# Altium PCB A5000_8MB.pcbdoc (part 1 of 2)
Units mm, origin at the board's own origin, x right, y up, seen from the top; angles counter-clockwise.
Board outline 99.95 x 80.31 mm, 4 copper layers (TopLayer, GND, VCC, BottomLayer), stack 1.659 mm thick; 71 components, 180 nets, 691 pads, 418 vias.
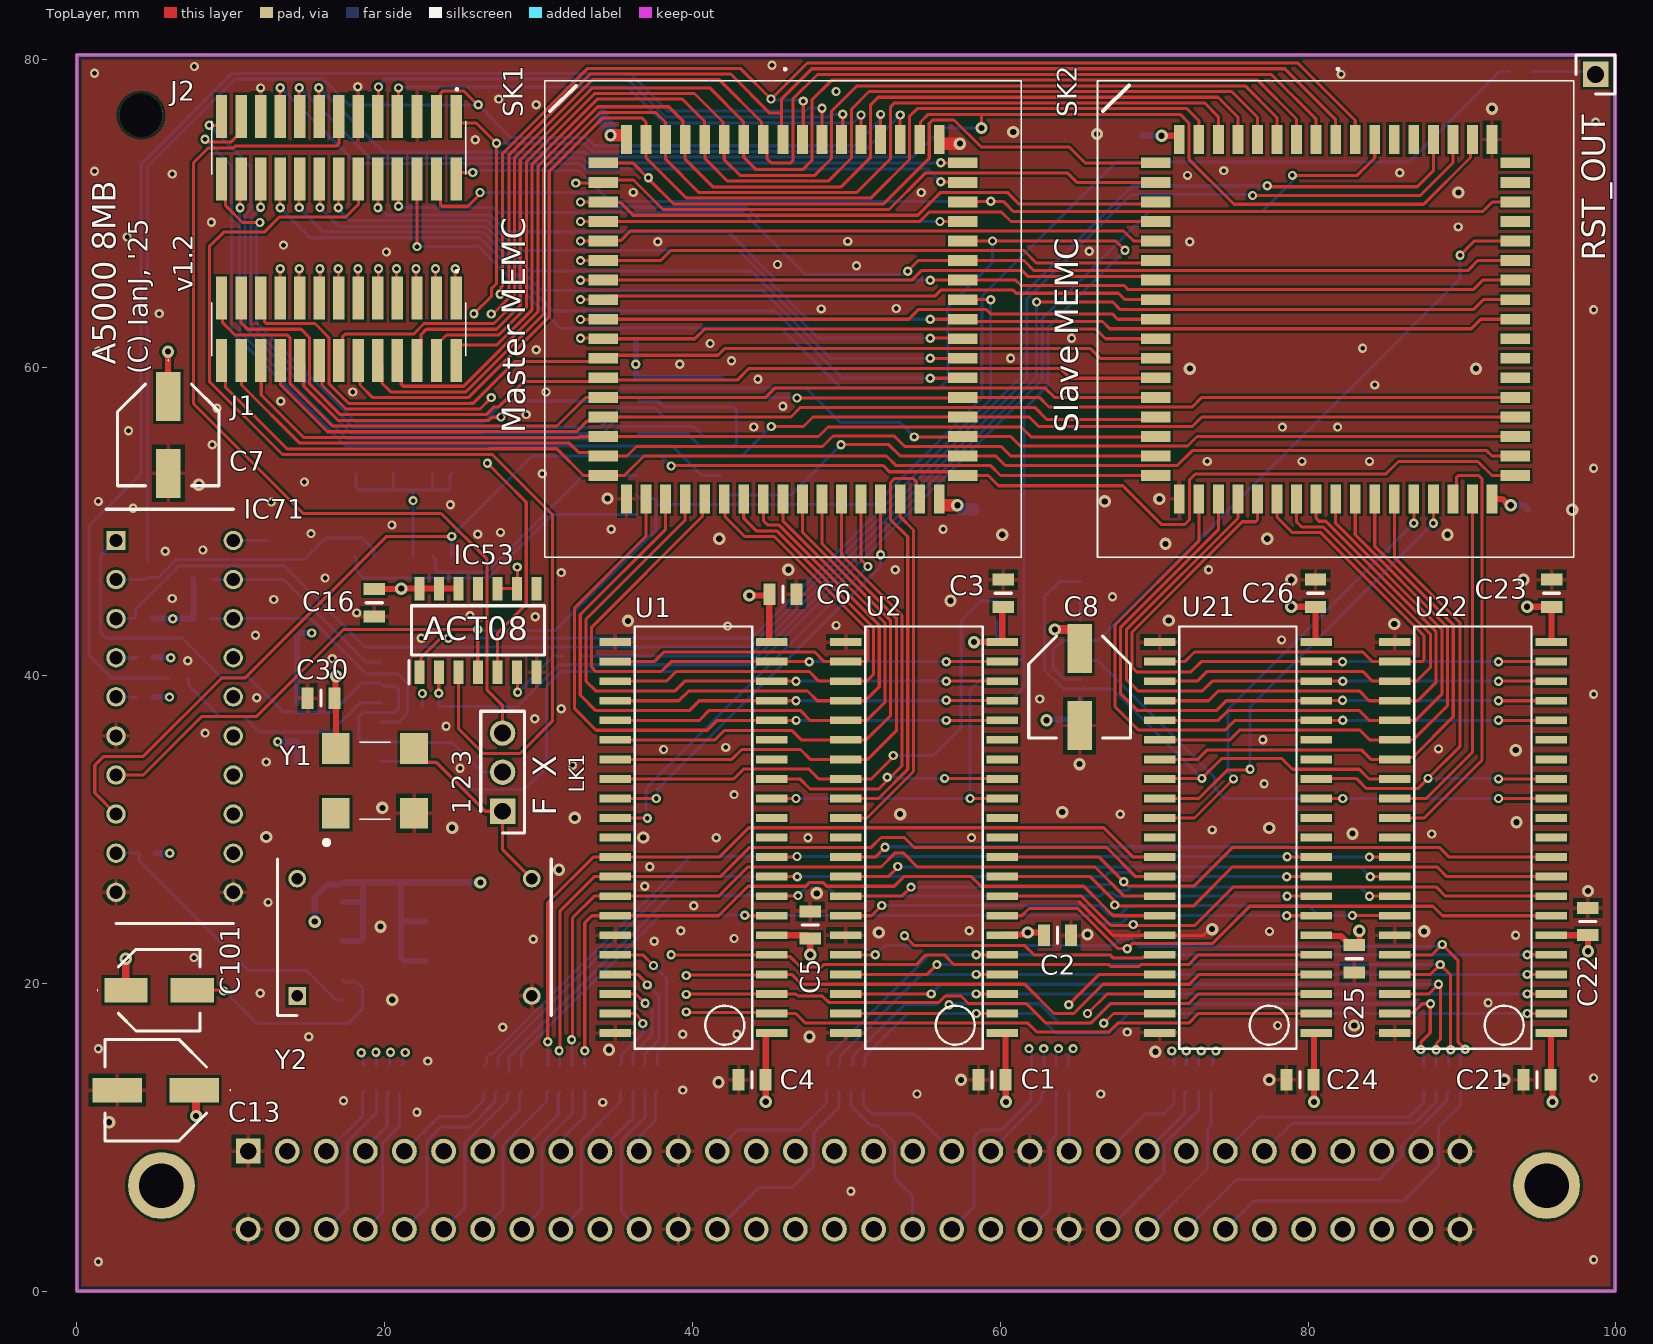
[diagram p0: TopLayer view]
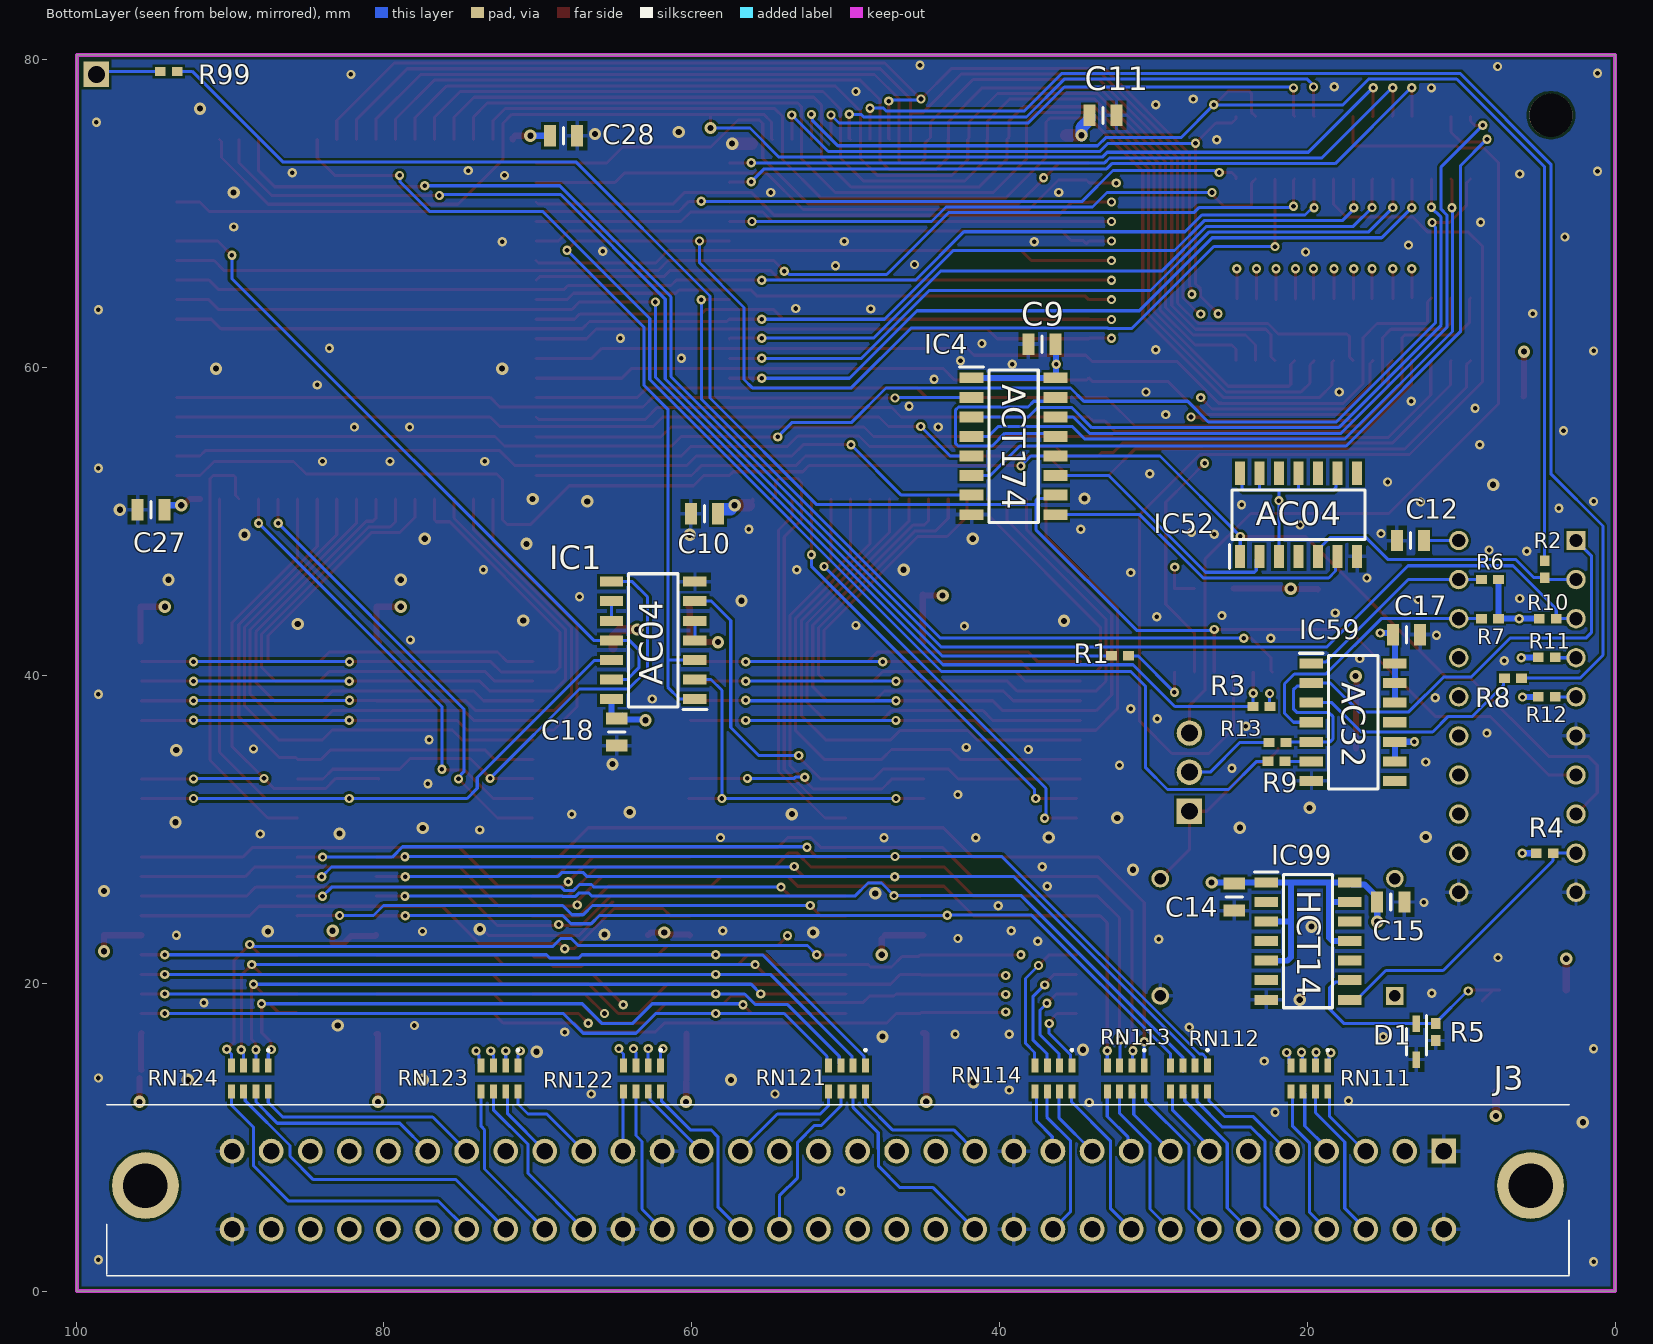
[diagram p1: BottomLayer view, seen from below]
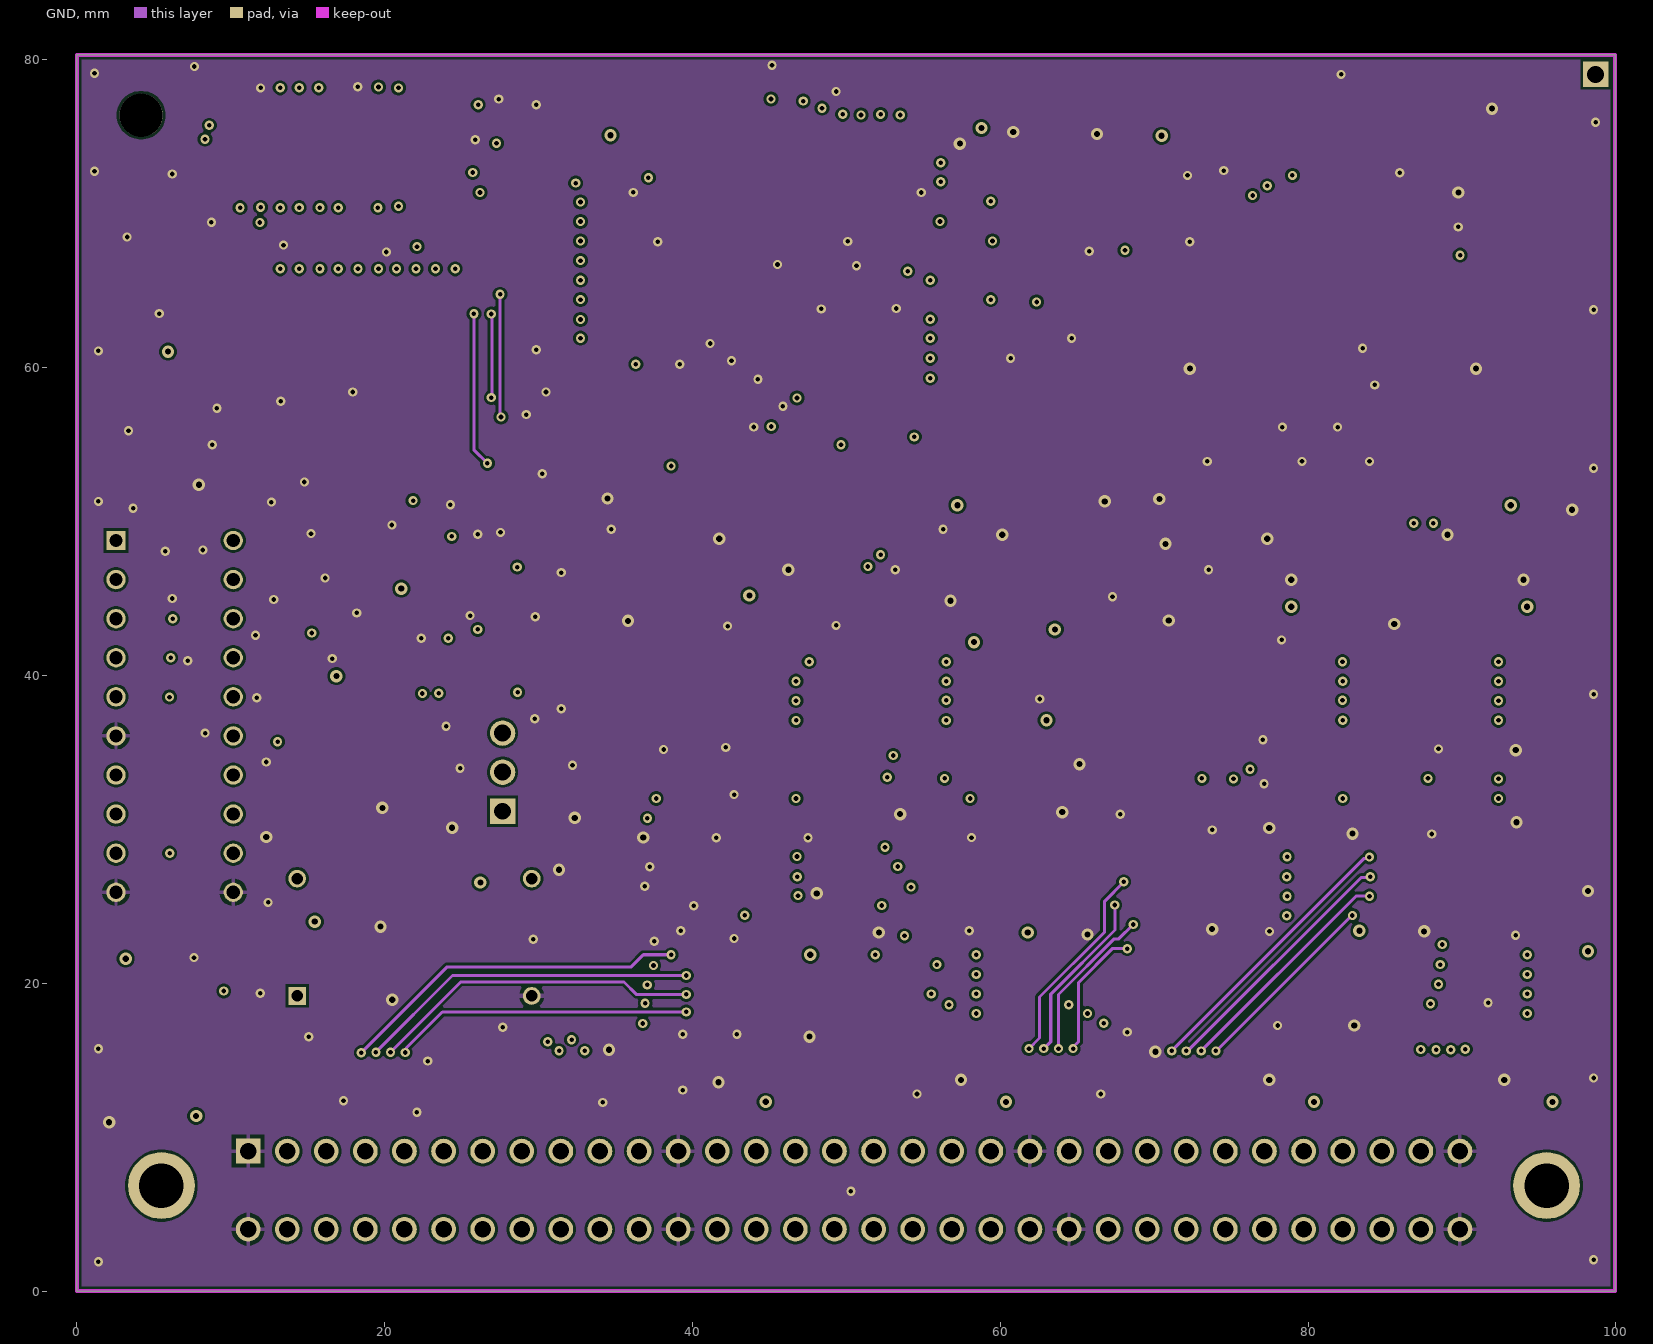
[diagram p2: GND]
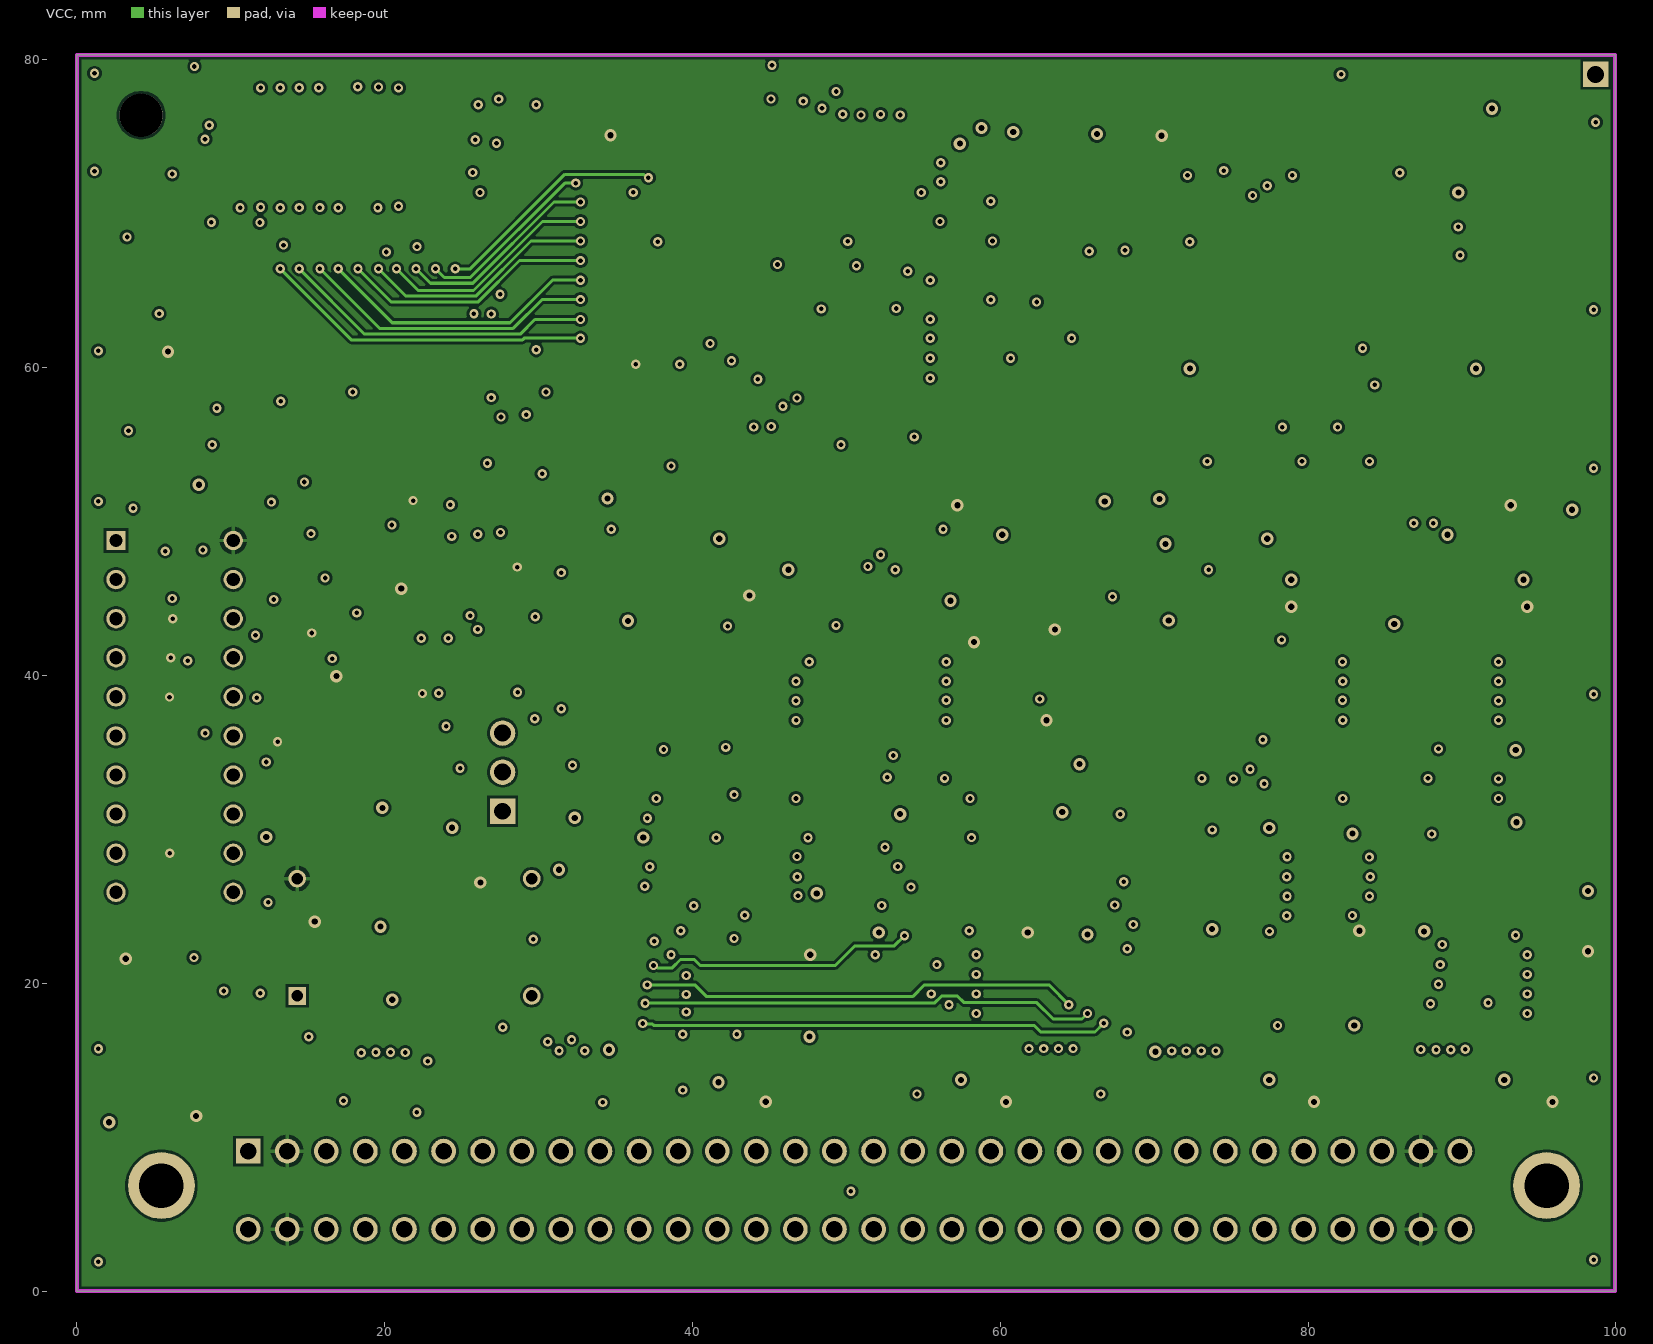
[diagram p3: VCC]
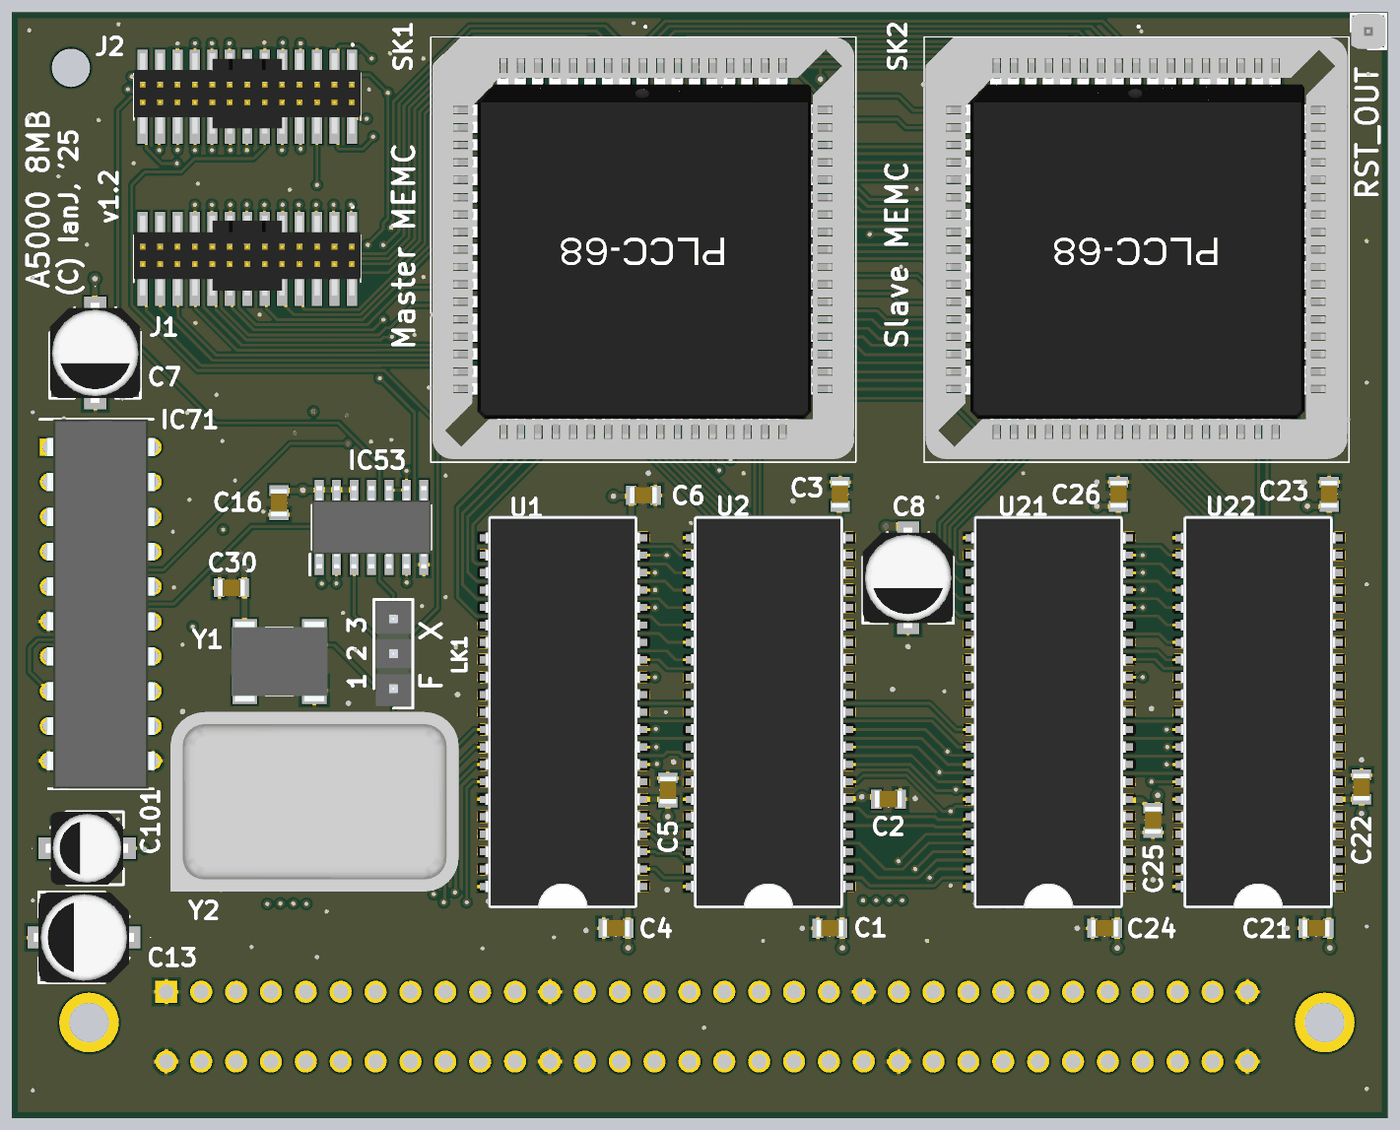
[diagram p5: 3D render of the assembled board from above, using the file's embedded part models]
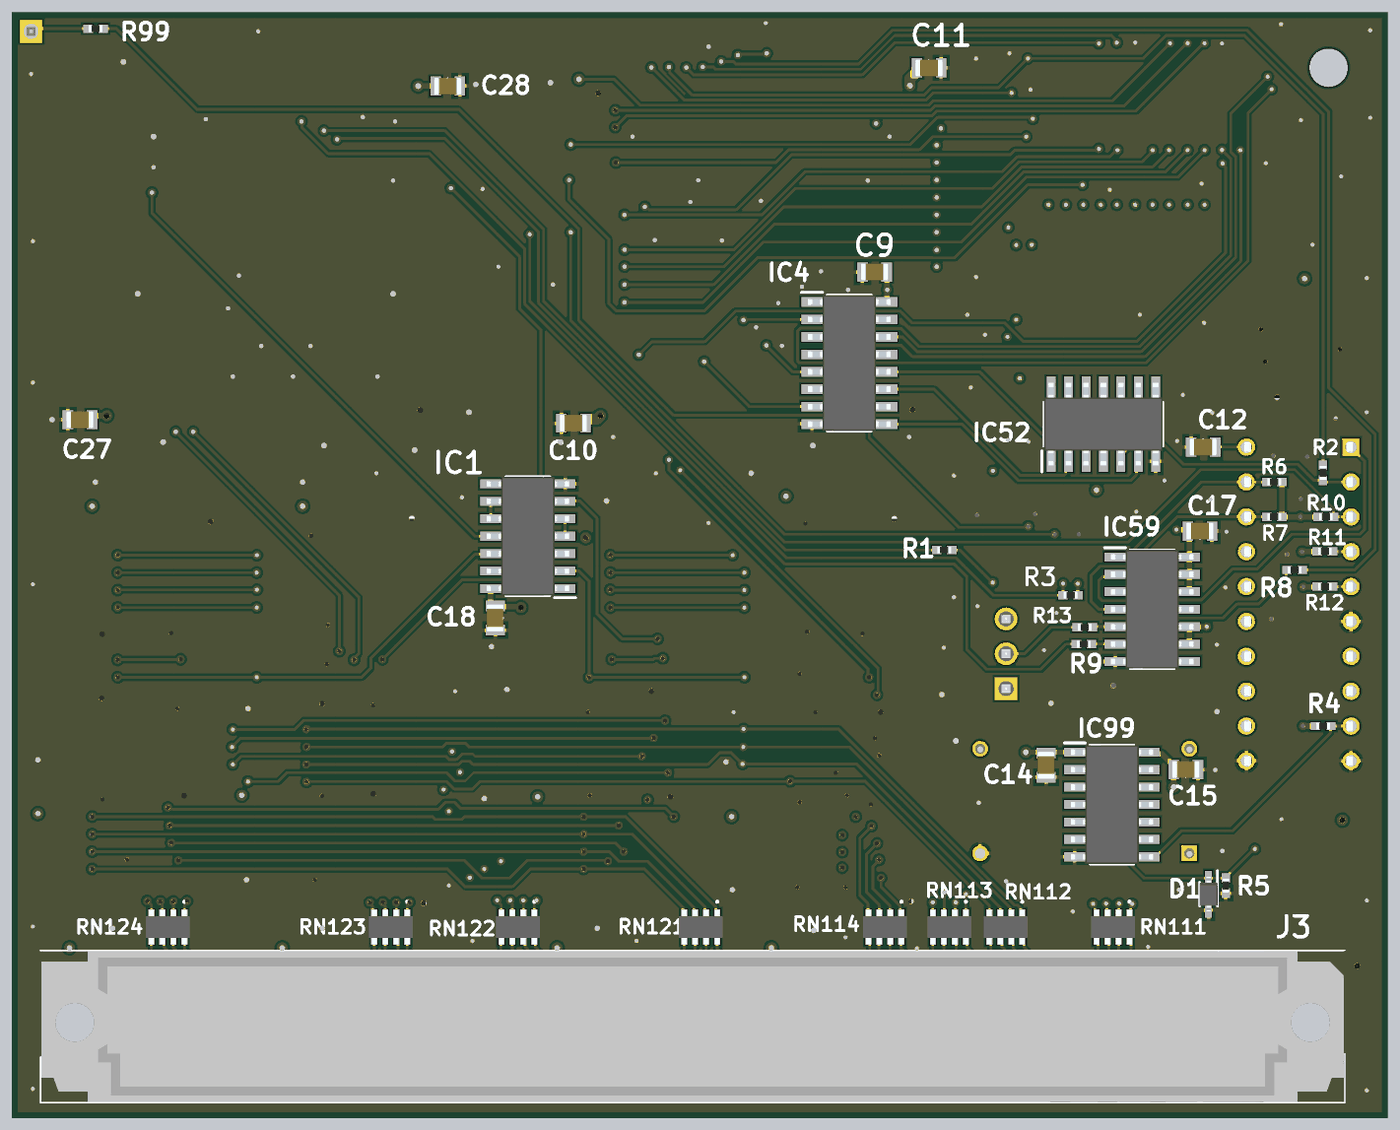
[diagram p6: 3D render of the assembled board from below, using the file's embedded part models]

## Layer stack, top to bottom
TopSolder: solder mask 0.01, Solder Resist, Dk 3.5
TopLayer: signal copper 0.036
Dielectric 1: prepreg 0.2083, PP-022, Dk 4.5
GND: signal copper 0.035
Dielectric 2: core 1.1, Core-043, Dk 4.3
VCC: signal copper 0.035
Dielectric 3: prepreg 0.2083, PP-022, Dk 4.5
BottomLayer: signal copper 0.036
BottomSolder: solder mask 0.01, Solder Resist, Dk 3.5

## Board outline
0,0 0,80.315 99.949,80.315 99.949,0

## Design rules (kind name [scope] priority, off if disabled: settings)
BoardOutlineClearance [All] p1: gap=0.3 ignorepadtopadclearanceinfootprint=FALSE
Clearance [All] p1: gap=0.17 ignorepadtopadclearanceinfootprint=FALSE except(0.163: Arc-SMDPad Track-SMDPad; 0.3: Via-Via; 0.5: Via-Hole)
ComponentClearance ComponentClearance_Z2_Z3 [(InComponent('Z2') OR InComponent('Z3')) vs InComponent('No Component')] p1: gap=0 collisioncheckmode=3 verticalgap=0 showdistances=FALSE
ComponentClearance ComponentClearance_U4_J104 [All] p2: gap=0 collisioncheckmode=3 verticalgap=0 showdistances=FALSE
ComponentClearance ComponentClearance_J3_J4 [InComponent('J3') vs InComponent('J4')] p3: gap=0 collisioncheckmode=3 verticalgap=0 showdistances=FALSE
ComponentClearance ComponentClearance_J103_J104 [InComponent('J103') vs InComponent('J104')] p4: gap=0 collisioncheckmode=3 verticalgap=0 showdistances=FALSE
ComponentClearance [All] p5: gap=0.254 collisioncheckmode=3 verticalgap=0.254 showdistances=FALSE
DiffPairsRouting [InDifferentialPairClass('All Differential Pairs')] p1: maxlimit=0.254 minlimit=0.114 mostfreqgap=0.17 toplayer_mingap=0.17 toplayer_minwidth=0.2 toplayer_maxwidth=0.381 toplayer_prefwidth=0.237 midlayer1_prefgap=0.115 midlayer1_minwidth=0.381 midlayer1_maxwidth=0.381 midlayer1_prefwidth=0.381 midlayer2_prefgap=0.115 midlayer2_minwidth=0.381 midlayer2_maxwidth=0.381 midlayer2_prefwidth=0.381 bottomlayer_mingap=0.17 bottomlayer_minwidth=0.2 bottomlayer_maxwidth=0.381 bottomlayer_prefwidth=0.237 maxuncoupledlength=12.7
FabricationTestPointUsage TestPointUsage [All] p1: valid=0 allowmultiple=FALSE
FabricationTestpoint Testpoint [All] p1: side=3 testpointundercomponent=TRUE minsize=1.016 maxsize=2.54 preferedsize=1.524 minholesize=0.508 maxholesize=1.016 preferedholesize=0.813 testpointgrid=0.025 allowsidetop=TRUE allowsidebottom=TRUE usegrid=TRUE gridtolerance=0
HoleSize [All] p1: absolutevalues=TRUE maxlimit=5 minlimit=0.3 maxpercent=80.000 minpercent=20.000
HoleToHoleClearance [All] p1: gap=0.25 allowstackedmicrovias=FALSE
MinimumSolderMaskSliver [All] p1: minsoldermaskwidth=0.02
PlaneClearance [All] p1: clearance=0.2
PlaneConnect [All] p1: pad.planeconnectstyle=Relief pad.reliefexpansion=0.508 pad.reliefentries=4 pad.reliefconductorwidth=0.254 pad.reliefairgap=0.254 via.planeconnectstyle=Direct via.reliefexpansion=0.508 via.reliefentries=4 via.reliefconductorwidth=0.254 via.reliefairgap=0.254
PolygonConnect [All] p1: thpad.connectstyle=Relief thpad.reliefconductorwidth=0.254 thpad.reliefentries=4 thpad.polygonreliefangle="90 Angle" thpad.airgapwidth=0.254 smdpad.connectstyle=Relief smdpad.reliefconductorwidth=0.254 smdpad.reliefentries=4 smdpad.polygonreliefangle="90 Angle" smdpad.airgapwidth=0.254 via.connectstyle=Direct via.reliefconductorwidth=0.254 via.reliefentries=4 via.polygonreliefangle="90 Angle" via.airgapwidth=0.254
RoutingVias [All] p1: holewidth=0.4 width=0.8 viastyle="Through Hole" minholewidth=0.3 minwidth=0.6 maxholewidth=0.4 maxwidth=0.8
SilkToSilkClearance [All] p1: silktosilkclearance=0.1
SilkToSolderMaskClearance SilkscreenOverComponentPads [IsPad] p1: minsilkscreentomaskgap=0.1 clearancetoexposedcopper=TRUE
SolderMaskExpansion [All] p1: expansion=0.075 istentingtop=FALSE
SupplyNets "Schematic Supply Nets_1" [InNet('GND')] p1: voltage=0.000
SupplyNets "Schematic Supply Nets" [InNet('VCC')] p2: voltage=0.000
Width [All] p1: maxlimit=5 minlimit=0.15 preferedwidth=0.2
19 further rules are at their usual default settings.

## Classes and differential pairs
component class A5000_8MB_RAMs: C1 C2 C3 C4 C5 C6 C7 C8 C21 C22 C23 C24 C25 C26 RN111 RN112 RN113 RN114 RN121 RN122 RN123 RN124 U1 U2 U21 U22
component class A5000_8MB_Glue: C30 C101 D1 IC1 IC4 IC52 IC53 IC59 IC71 IC99 LK1 R1 R2 R3 R4 R5 R6 R7 R8 R9 R10 R11 R12 R13 R99 RST_OUT Y1 Y2
component class A5000_8MB_MEMCs: C9 C10 C11 C12 C13 C14 C15 C16 C17 C18 C27 C28 J1 J2 J3 SK1 SK2

## Components (designator, comment, footprint, x,y, rotation, side; value= is the part's Value field where it differs from the comment)
C1 "100nF" 0805cap 59.462,13.721 r180 top
C2 "100nF" 0805cap 63.715,23.123 r0 top
C3 "100nF" 0805cap 60.192,45.339 r90 top
C4 "100nF" 0805cap 43.876,13.721 r180 top
C5 "100nF" 0805cap 47.655,23.783 r90 top
C6 "100nF" 0805cap 45.872,45.268 r0 top
C7 "47uF" EEE1AA101SP 5.943,55.626 r270 top
C8 "47uF" EEE1AA101SP 65.151,39.243 r270 top
C9 "100nF" 0805cap 37.247,61.524 r0 bottom
C10 "100nF" 0805cap 59.176,50.509 r0 bottom
C11 "100nF" 0805cap 33.277,76.39 r180 bottom
C12 "100nF" 0805cap 13.306,48.768 r0 bottom
C13 "47uF" EEE1AA101SP 5.123,13.053 r180 top
C14 "100nF" 0805cap 24.754,25.599 r270 bottom
C15 "100nF" 0805cap 14.576,25.278 r180 bottom
C16 "100nF" 0805cap 19.326,44.72 r270 top
C17 "100nF" 0805cap 13.543,42.649 r180 bottom
C18 "100nF" 0805cap 64.875,36.322 r270 bottom
C21 "100nF" 0805cap 94.869,13.721 r180 top
C22 "100nF" 0805cap 98.171,24.003 r90 top
C23 "100nF" 0805cap 95.821,45.339 r90 top
C24 "100nF" 0805cap 79.468,13.721 r180 top
C25 "100nF" 0805cap 82.995,21.59 r270 top
C26 "100nF" 0805cap 80.479,45.339 r90 top
C27 "100nF" 0805cap 95.126,50.764 r0 bottom
C28 "100nF" 0805cap 68.326,75.063 r180 bottom
C30 "100nF" 0805cap 15.868,38.528 r180 top
C101 "10uF" EEE0GA101SR 5.345,19.55 r0 top
D1 "1N4148WS-7-F" SOD2513X120N 12.915,16.203 r270 bottom
IC1 "SN74AC04D" SOIC127P600X175-14N 62.5,42.28 r0 bottom
IC4 "CD74ACT174M96" SOIC127P600X175-16N 39.084,54.889 r180 bottom
IC52 "SN74AC04D" SOIC127P600X175-14N 20.574,50.439 r90 bottom
IC53 "CD74ACT08M" SOIC127P600X175-14N 26.069,42.926 r90 top
IC59 "CD74AC32M" SOIC127P600X175-14N 17.018,36.957 r180 bottom
IC71 "ATF16V8C" DIP762W66P254L2692H508Q20N 6.35,37.338 r0 top locked
IC99 "SN74HCT14DR" SOIC127P600X175-14N 19.951,22.733 r180 bottom
J1 "FTSH-113-01-L-DV-K" FTSH-113-XX-YYY-DV-K 17.018,62.484 r180 top locked
J2 "FTSH-113-01-L-DV-K" FTSH-113-XX-YYY-DV-K 17.018,74.292 r180 top locked
J3 "5650934-5" 56509345 11.125,9.093 r180 bottom locked
LK1 "PREC003SAAN-RC" HDRV3W64P0X254_1X3_762X254X868P 27.664,31.173 r90 top
R1 "33R" RESC1005X40N 32.172,41.275 r180 bottom
R2 "68R" RESC1005X40N 4.578,46.9 r90 bottom
R3 "10K" RESC1005X40N 22.971,37.978 r180 bottom
R4 "10K" RESC1005X40N 4.572,28.448 r0 bottom
R5 "47K" RESC1005X40N 11.656,16.828 r270 bottom
R6 "1K" RESC1005X40N 8.128,46.228 r180 bottom
R7 "1K" RESC1005X40N 8.128,43.688 r180 bottom
R8 "68R" RESC1005X40N 6.64,39.822 r0 bottom
R9 "68R" RESC1005X40N 21.999,34.417 r180 bottom
R10 "10K" RESC1005X40N 4.372,43.688 r0 bottom
R11 "10K" RESC1005X40N 4.445,41.179 r0 bottom
R12 "10K" RESC1005X40N 4.445,38.608 r0 bottom
R13 "33R" RESC1005X40N 21.934,35.647 r0 bottom
R99 "68R" RESC1005X40N 93.98,79.248 r180 bottom
RN111 "YC164-JR-0768RL" YC164JR0768RL 19.87,13.804 r0 bottom
RN112 "YC164-JR-0768RL" YC164JR0768RL 27.686,13.804 r0 bottom
RN113 "YC164-JR-0768RL" YC164JR0768RL 31.795,13.804 r0 bottom
RN114 "YC164-JR-0768RL" YC164JR0768RL 36.494,13.804 r0 bottom
RN121 "YC164-JR-0768RL" YC164JR0768RL 49.911,13.804 r0 bottom
RN122 "YC164-JR-0768RL" YC164JR0768RL 63.225,13.804 r0 bottom
RN123 "YC164-JR-0768RL" YC164JR0768RL 72.485,13.804 r0 bottom
RN124 "YC164-JR-0768RL" YC164JR0768RL 88.715,13.804 r0 bottom
RST_OUT "90120-0761" HDRV1W90P0X254_1X1_232X249X560P 98.679,79.05 r90 top
SK1 "Master MEMC socket" MEMC_Socket 45.872,63.144 r0 top locked
SK2 "Slave MEMC socket" MEMC_Socket 81.792,63.144 r0 top locked
U1 "IS41C16105C" SOJ-42 40.066,29.464 r90 top locked
U2 "IS41C16105C" SOJ-42 55.042,29.464 r90 top locked
U21 "IS41C16105C" SOJ-42 75.442,29.464 r90 top locked
U22 "IS41C16105C" SOJ-42 90.711,29.464 r90 top locked
Y1 "CB3-3C-50M0000" CB33C50M0000 19.368,33.147 r0 top
Y2 "50MHz OSC" DIPS762W56P1524L1778H241Q4N 14.314,19.174 r90 top locked

## Footprints (in the part's own frame and the unit in brackets; to place one, negate y for a bottom-side part, rotate by r counter-clockwise, add the part's x,y. Pads: shape width x height; smd on the part's side, far side on the other; paste and mask are expansions set on the pad)
0805cap [mm]
  rect 0.78x1.39 smd: 1(-0.88,0) 2(0.88,0)
  silkscreen extent 0,-0.53 0,0.53, body extent -1,-0.63 1,0.63, height 0.6
56509345 [mm]
  rect 1.605x1.605 hole 1.07: A1(0,0)
  round 1.605 hole 1.07: A2(-2.54,0) A3(-5.08,0) A4(-7.62,0) A5(-10.16,0) A6(-12.7,0) A7(-15.24,0) A8(-17.78,0) A9(-20.32,0) A10(-22.86,0) A11(-25.4,0) A12(-27.94,0) A13(-30.48,0) A14(-33.02,0) A15(-35.56,0) A16(-38.1,0) A17(-40.64,0) A18(-43.18,0) A19(-45.72,0) A20(-48.26,0) A21(-50.8,0) A22(-53.34,0) A23(-55.88,0) A24(-58.42,0) A25(-60.96,0) A26(-63.5,0) A27(-66.04,0) A28(-68.58,0) A29(-71.12,0) A30(-73.66,0) A31(-76.2,0) A32(-78.74,0) C1(0,-5.08) C2(-2.54,-5.08) C3(-5.08,-5.08) C4(-7.62,-5.08) C5(-10.16,-5.08) C6(-12.7,-5.08) C7(-15.24,-5.08) C8(-17.78,-5.08) C9(-20.32,-5.08) C10(-22.86,-5.08) C11(-25.4,-5.08) C12(-27.94,-5.08) C13(-30.48,-5.08) C14(-33.02,-5.08) C15(-35.56,-5.08) C16(-38.1,-5.08) C17(-40.64,-5.08) C18(-43.18,-5.08) C19(-45.72,-5.08) C20(-48.26,-5.08) C21(-50.8,-5.08) C22(-53.34,-5.08) C23(-55.88,-5.08) C24(-58.42,-5.08) C25(-60.96,-5.08) C26(-63.5,-5.08) C27(-66.04,-5.08) C28(-68.58,-5.08) C29(-71.12,-5.08) C30(-73.66,-5.08) C31(-76.2,-5.08) C32(-78.74,-5.08)
  round 4.335 hole 2.89: MH1(5.63,-2.24) MH2(-84.37,-2.24)
  silkscreen extent -86.87,-8.09 8.13,3.01, body extent -86.8,-8.05 8.06,2.97, height 11.63
CB33C50M0000 [mm]
  rect 1.8x2 smd: 1(-2.54,-2.1) 2(2.54,-2.1) 3(2.54,2.1) 4(-2.54,2.1)
  silkscreen extent -3.3,-4.15 1,2.5, body extent -3.5,-2.92 3.5,2.92, height 1.9
DIP762W66P254L2692H508Q20N [mm]
  rect 1.26x1.26 hole 0.86: 1(-3.81,11.43)
  round 1.26 hole 0.86: 2(-3.81,8.89) 3(-3.81,6.35) 4(-3.81,3.81) 5(-3.81,1.27) 6(-3.81,-1.27) 7(-3.81,-3.81) 8(-3.81,-6.35) 9(-3.81,-8.89) 10(-3.81,-11.43) 11(3.81,-11.43) 12(3.81,-8.89) 13(3.81,-6.35) 14(3.81,-3.81) 15(3.81,-1.27) 16(3.81,1.27) 17(3.81,3.81) 18(3.81,6.35) 19(3.81,8.89) 20(3.81,11.43)
  silkscreen extent -4.44,-13.46 3.81,13.46, body extent -3.98,-13.46 3.98,13.46, height 5.08
DIPS762W56P1524L1778H241Q4N [mm]
  rect 1.15x1.15 hole 0.75: 1(0,0)
  round 1.15 hole 0.75: 2(0,-15.24) 3(7.62,-15.24) 4(7.62,0)
  silkscreen extent -1.27,-16.51 8.89,1.27, body extent -2.78,-18.11 10.3,2.89, height 6
EEE0GA101SR [mm]
  rect 2.8x1.6 smd: 1(-2.15,0) 2(2.15,0)
  silkscreen extent -4.03,-2.65 2.65,2.65, body extent -3,-2.65 3,2.65, height 5.8
EEE1AA101SP [mm]
  rect 3.2x1.6 smd: 1(-2.5,0) 2(2.5,0)
  silkscreen extent -4.88,-3.3 3.3,3.3, body extent 0,0 0,0
FTSH-113-XX-YYY-DV-K [mm]
  rect 0.74x2.79 smd: 1(-7.62,-2.035) 2(-7.62,2.035) 3(-6.35,-2.035) 4(-6.35,2.035) 5(-5.08,-2.035) 6(-5.08,2.035) 7(-3.81,-2.035) 8(-3.81,2.035) 9(-2.54,-2.035) 10(-2.54,2.035) 11(-1.27,-2.035) 12(-1.27,2.035) 13(0,-2.035) 14(0,2.035) 15(1.27,-2.035) 16(1.27,2.035) 17(2.54,-2.035) 18(2.54,2.035) 19(3.81,-2.035) 20(3.81,2.035) 21(5.08,-2.035) 22(5.08,2.035) 23(6.35,-2.035) 24(6.35,2.035) 25(7.62,-2.035) 26(7.62,2.035)
  silkscreen extent -8.25,-3.83 8.25,1.72, body extent -8.26,-3.15 8.25,2.69, height 6.12
HDRV1W90P0X254_1X1_232X249X560P [mm]
  rect 1.65x1.65 hole 1.1: 1(0,0)
  silkscreen extent -1.27,-1.27 1.27,1.27, body extent -1.27,-1.25 1.27,1.25, height 5.37
HDRV3W64P0X254_1X3_762X254X868P [mm]
  rect 1.65x1.65 hole 1.1: 1(0,0)
  round 1.65 hole 1.1: 2(2.54,0) 3(5.08,0)
  silkscreen extent -1.42,-1.42 6.5,1.42, body extent -1.27,-1.27 6.35,1.27, height 8.68
MEMC_Socket [mm]
  rect 0.7x1.91 smd: 1(0,11.68) 2(-1.27,11.68) 3(-2.54,11.68) 4(-3.81,11.68) 5(-5.08,11.68) 6(-6.35,11.68) 7(-7.62,11.68) 8(-8.89,11.68) 9(-10.16,11.68) 27(-10.16,-11.68) 28(-8.89,-11.68) 29(-7.62,-11.68) 30(-6.35,-11.68) 31(-5.08,-11.68) 32(-3.81,-11.68) 33(-2.54,-11.68) 34(-1.27,-11.68) 35(0,-11.68) 36(1.27,-11.68) 37(2.54,-11.68) 38(3.81,-11.68) 39(5.08,-11.68) 40(6.35,-11.68) 41(7.62,-11.68) 42(8.89,-11.68) 43(10.16,-11.68) 61(10.16,11.68) 62(8.89,11.68) 63(7.62,11.68) 64(6.35,11.68) 65(5.08,11.68) 66(3.81,11.68) 67(2.54,11.68) 68(1.27,11.68)
  rect 1.91x0.7 smd: 10(-11.68,10.16) 11(-11.68,8.89) 12(-11.68,7.62) 13(-11.68,6.35) 14(-11.68,5.08) 15(-11.68,3.81) 16(-11.68,2.54) 17(-11.68,1.27) 18(-11.68,0) 19(-11.68,-1.27) 20(-11.68,-2.54) 21(-11.68,-3.81) 22(-11.68,-5.08) 23(-11.68,-6.35) 24(-11.68,-7.62) 25(-11.68,-8.89) 26(-11.68,-10.16) 44(11.68,-10.16) 45(11.68,-8.89) 46(11.68,-7.62) 47(11.68,-6.35) 48(11.68,-5.08) 49(11.68,-3.81) 50(11.68,-2.54) 51(11.68,-1.27) 52(11.68,0) 53(11.68,1.27) 54(11.68,2.54) 55(11.68,3.81) 56(11.68,5.08) 57(11.68,6.35) 58(11.68,7.62) 59(11.68,8.89) 60(11.68,10.16)
  silkscreen extent -15.48,-15.48 15.48,16.3, body extent -15.37,-15.24 15.37,15.47, height 5.08
RESC1005X40N [mm]
  rect 0.7x0.6 smd: 1(-0.55,0) 2(0.55,0)
  body extent -0.5,-0.25 0.5,0.25, height 0.4
SOD2513X120N [mm]
  rect 1.075x0.5 smd: 1(-1.162,0) 2(1.162,0)
  silkscreen extent -1.7,-0.65 0.85,0.65, body extent -1.25,-0.65 1.25,0.65, height 1.2
SOIC127P600X175-14N [mm]
  rect 1.525x0.65 smd: 1(-2.712,3.81) 2(-2.712,2.54) 3(-2.712,1.27) 4(-2.712,0) 5(-2.712,-1.27) 6(-2.712,-2.54) 7(-2.712,-3.81) 8(2.712,-3.81) 9(2.712,-2.54) 10(2.712,-1.27) 11(2.712,0) 12(2.712,1.27) 13(2.712,2.54) 14(2.712,3.81)
  silkscreen extent -3.47,-4.33 1.6,4.48, body extent -3,-4.33 3,4.33, height 1.75
SOIC127P600X175-16N [mm]
  rect 1.55x0.7 smd: 1(-2.725,4.445) 2(-2.725,3.175) 3(-2.725,1.905) 4(-2.725,0.635) 5(-2.725,-0.635) 6(-2.725,-1.905) 7(-2.725,-3.175) 8(-2.725,-4.445) 9(2.725,-4.445) 10(2.725,-3.175) 11(2.725,-1.905) 12(2.725,-0.635) 13(2.725,0.635) 14(2.725,1.905) 15(2.725,3.175) 16(2.725,4.445)
  silkscreen extent -3.5,-4.95 1.6,5.15, body extent -3,-4.95 3,4.95, height 1.75
SOJ-42 [mil]
  rect 20x80 smd mask+7.87: 1(-500,-200) 2(-450,-200) 3(-400,-200) 4(-350,-200) 5(-300,-200) 6(-250,-200) 7(-200,-200) 8(-150,-200) 9(-100,-200) 10(-50,-200) 11(0,-200) 12(50,-200) 13(100,-200) 14(150,-200) 15(200,-200) 16(250,-200) 17(300,-200) 18(350,-200) 19(400,-200) 20(450,-200) 21(500,-200) 22(500,200) 23(450,200) 24(400,200) 25(350,200) 26(300,200) 27(250,200) 28(200,200) 29(150,200) 30(100,200) 31(50,200) 32(0,200) 33(-50,200) 34(-100,200) 35(-150,200) 36(-200,200) 37(-250,200) 38(-300,200) 39(-350,200) 40(-400,200) 41(-450,200) 42(-500,200)
  silkscreen extent -540,-150 540,150, body extent -563,-220 563,225, height 149
YC164JR0768RL [mm]
  rect 0.45x0.9 smd: 1(-1.2,-0.85) 2(-0.4,-0.85) 3(0.4,-0.85) 4(1.2,-0.85) 5(1.2,0.85) 6(0.4,0.85) 7(-0.4,0.85) 8(-1.2,0.85)
  silkscreen extent -1.25,-1.9 -1.15,-1.8, body extent -1.6,-1.25 1.6,1.25, height 0.8

## Part data
C1 C2 C3 C4 C5 C6 C9 C10 C11 C12 C14 C15 C16 C17 C18 C21 C22 C23 C24 C25 C26 C27 C28 C30: library part 100nF0805, "Capacitor", Arrow Part Number=C2012X7R1H104K125AM, LCSC Part #=C111492, Manufacturer_Name=TDK, Mouser Part Number=810-C2012X7R1H104KT5, Arrow Price/Stock=https://www.arrow.com/en/products/c2012x7r1h104k125am/tdk, Datasheet Link=https://product.tdk.com/info/en/catalog/datasheets/mlcc_commercial_midvoltage_en.pdf, Height=1.45mm, Manufacturer_Part_Number=C2012X7R1H104K125AM, Mouser Price/Stock=https://www.mouser.com/Search/Refine.aspx?Keyword=810-C2012X7R1H104KT5
C7 C8 C13: library part EEE1VA470WP, "Capacitor Polarised", Manufacturer_Name=Panasonic, Datasheet Link=http://industrial.panasonic.com/cdbs/www-data/pdf/RDE0000/ABA0000C1145.pdf, Height=7.8mm, Manufacturer_Part_Number=EEE1VA470WP
C101: library part EEE-1EA100SR, "Capacitor Polarised", Manufacturer_Name=Panasonic, Mouser Part Number=667-EEE-1EA100SR, Arrow Part Number=EEE-1EA100SR, Arrow Price/Stock=https://www.arrow.com/en/products/eee-1ea100sr/panasonic?region=nac, Datasheet Link=http://industrial.panasonic.com/cdbs/www-data/pdf/RDE0000/ABA0000C1145.pdf, Height=6.5mm, Manufacturer_Part_Number=EEE-1EA100SR, Mouser Price/Stock=https://www.mouser.co.uk/ProductDetail/Panasonic/EEE-1EA100SR?qs=ANJC8C65Mw4%2Fvo1GoepKcQ%3D%3D
D1: "Diode", LCSC Part #=C2128, Manufacturer_Name="Diodes Inc.", Mouser Part Number=621-1N4148WS-F, Arrow Part Number=1N4148WS-7-F, Arrow Price/Stock=https://www.arrow.com/en/products/1n4148ws-7-f/diodes-incorporated?region=asia, Datasheet Link=https://componentsearchengine.com/Datasheets/2/1N4148WS-7-F.pdf, Height=1.2mm, Manufacturer_Part_Number=1N4148WS-7-F, Mouser Price/Stock=https://www.mouser.co.uk/ProductDetail/Diodes-Incorporated/1N4148WS-7-F?qs=4drIV0IxA0r8aNy7%2Fu4kVw%3D%3D
IC1 IC52: "Integrated Circuit", LCSC Part #=C352940, Manufacturer_Name="Texas Instruments", Mouser Part Number=595-SN74AC04D, Arrow Part Number=SN74AC04D, Arrow Price/Stock=https://www.arrow.com/en/products/sn74ac04d/texas-instruments?region=nac, Datasheet Link=http://www.ti.com/lit/ds/symlink/sn74ac04.pdf, Height=1.75mm, Manufacturer_Part_Number=SN74AC04D, Mouser Price/Stock=https://www.mouser.co.uk/ProductDetail/Texas-Instruments/SN74AC04D?qs=w32V8uFkMxkvsyMHHacuZw%3D%3D
IC4: "Integrated Circuit", Manufacturer_Name="Texas Instruments", Mouser Part Number=595-CD74ACT174M96, Datasheet Link=http://www.ti.com/lit/gpn/cd74act174, Height=1.75mm, Manufacturer_Part_Number=CD74ACT174M96, Mouser Price/Stock=https://www.mouser.co.uk/ProductDetail/Texas-Instruments/CD74ACT174M96?qs=w32V8uFkMxkDXs1ka6HDkg%3D%3D
IC53: "Integrated Circuit", LCSC Part #=C233452, Manufacturer_Name="Texas Instruments", Mouser Part Number=595-CD74ACT08M, Datasheet Link=http://www.ti.com/lit/ds/symlink/cd74act08.pdf, Height=1.75mm, Manufacturer_Part_Number=CD74ACT08M, Mouser Price/Stock=https://www.mouser.co.uk/ProductDetail/Texas-Instruments/CD74ACT08M?qs=Dqy2GfToSoQdsNWXM2phYA%3D%3D
IC59: "Integrated Circuit", LCSC Part #=C352943, Manufacturer_Name="Texas Instruments", Mouser Part Number=595-CD74AC32M, Arrow Part Number=CD74AC32M, Arrow Price/Stock=https://www.arrow.com/en/products/cd74ac32m/texas-instruments, Datasheet Link=http://www.ti.com/lit/ds/symlink/cd74ac32.pdf, Height=1.75mm, Manufacturer_Part_Number=CD74AC32M, Mouser Price/Stock=https://www.mouser.co.uk/ProductDetail/Texas-Instruments/CD74AC32M?qs=OorDGPQ79Eqsy7tzrsTtUg%3D%3D
IC71: library part PAL16R4AMJ, "Integrated Circuit", Manufacturer_Name="Texas Instruments", Mouser Part Number=595-PAL16R4AMJ, Datasheet Link=http://www.ti.com/lit/ds/symlink/pal16r4am.pdf, Height=5.08mm, Manufacturer_Part_Number=PAL16R4AMJ, Mouser Price/Stock=https://www.mouser.com/Search/Refine.aspx?Keyword=595-PAL16R4AMJ
IC99: "Integrated Circuit", LCSC Part #=C6769, Manufacturer_Name="Texas Instruments", Mouser Part Number=595-SN74HCT14DR, Arrow Part Number=SN74HCT14DR, Arrow Price/Stock=https://www.arrow.com/en/products/sn74hct14dr/texas-instruments?region=nac, Datasheet Link=http://www.ti.com/lit/ds/symlink/sn74hct14.pdf, Height=1.75mm, Manufacturer_Part_Number=SN74HCT14DR, Mouser Price/Stock=https://www.mouser.co.uk/ProductDetail/Texas-Instruments/SN74HCT14DR?qs=SL3LIuy2dWxogEVGE105Iw%3D%3D
J1 J2: "Connector", Manufacturer_Name=SAMTEC, Mouser Part Number=200-FTSH11301LDVK, Arrow Part Number=FTSH-113-01-L-DV-K, Arrow Price/Stock=https://www.arrow.com/en/products/ftsh-113-01-l-dv-k/samtec, Datasheet Link=http://suddendocs.samtec.com/prints/ftsh-1xx-xx-xxx-dv-xxx-xxx-mkt.pdf, Manufacturer_Part_Number=FTSH-113-01-L-DV-K, Mouser Price/Stock=https://www.mouser.co.uk/ProductDetail/Samtec/FTSH-113-01-L-DV-K?qs=iT52DjcXudtZOdiFTGniSQ%3D%3D
J3: "Connector", Manufacturer_Name="TE Connectivity", Mouser Part Number=571-5650934-5, Arrow Part Number=5650934-5, Arrow Price/Stock=https://www.arrow.com/en/products/5650934-5/te-connectivity, Datasheet Link=https://datasheet.datasheetarchive.com/originals/distributors/Datasheets_SAMA/9abbe19037fbf7301e49f31c79c0c77d.pdf, Height=11.51mm, Manufacturer_Part_Number=5650934-5, Mouser Price/Stock=https://www.mouser.co.uk/ProductDetail/TE-Connectivity/5650934-5?qs=DpCaYn0bdggz0Lybp365wg%3D%3D
LK1: "Connector", Manufacturer_Name=Sullins, Datasheet Link=https://media.digikey.com/PDF/Data%20Sheets/Sullins%20PDFs/z%20RzCzzzSzzN-RC,%20ST,11635-B.pdf, Height=8.68mm, Manufacturer_Part_Number=PREC003SAAN-RC
R1 R13: library part CRCW040233R0FKED, "Resistor", LCSC Part #=C137880, Manufacturer_Name=Vishay, Mouser Part Number=71-CRCW0402-33-E3, Arrow Part Number=CRCW040233R0FKED, Arrow Price/Stock=https://www.arrow.com/en/products/crcw040233r0fked/vishay, Datasheet Link=http://www.vishay.com/docs/20035/dcrcwe3.pdf, Height=0.4mm, Manufacturer_Part_Number=CRCW040233R0FKED, Mouser Price/Stock=https://www.mouser.co.uk/ProductDetail/Vishay-Dale/CRCW040233R0FKED?qs=TNtMkGKFKOyo77UGFlXIJw%3D%3D
R2 R8 R9 R99: library part CRCW040268R0FKEDHP, "Resistor", LCSC Part #=C163455, Manufacturer_Name=Vishay, Mouser Part Number=71-CRCW040268R0FKEDH, Arrow Part Number=CRCW040268R0FKEDHP, Arrow Price/Stock=https://www.arrow.com/en/products/crcw040268r0fkedhp/vishay, Datasheet Link=http://www.vishay.com/docs/20035/dcrcwe3.pdf, Height=0.4mm, Manufacturer_Part_Number=CRCW040268R0FKEDHP, Mouser Price/Stock=https://www.mouser.co.uk/ProductDetail/Vishay-Dale/CRCW040268R0FKEDHP?qs=YaA%252B3EhhSt26vU44iyW%252BOw%3D%3D
R3 R4 R10 R11 R12: library part CRCW040210K0FKEDHP, "Resistor", LCSC Part #=C71617, Manufacturer_Name=Vishay, Mouser Part Number=71-CRCW040210K0FKEDH, Arrow Part Number=CRCW040210K0FKEDHP, Arrow Price/Stock=https://www.arrow.com/en/products/crcw040210k0fkedhp/vishay?region=nac, Datasheet Link=http://www.vishay.com/docs/20035/dcrcwe3.pdf, Height=0.4mm, Manufacturer_Part_Number=CRCW040210K0FKEDHP, Mouser Price/Stock=https://www.mouser.co.uk/ProductDetail/Vishay-Dale/CRCW040210K0FKEDHP?qs=FlFvgi4rxBxmIiaeyFjrkA%3D%3D
R5: library part CRCW040247K0FKED, "Resistor", LCSC Part #=C163440, Manufacturer_Name=Vishay, Mouser Part Number=71-CRCW0402-47K-E3, Arrow Part Number=CRCW040247K0FKED, Arrow Price/Stock=https://www.arrow.com/en/products/crcw040247k0fked/vishay, Datasheet Link=http://www.vishay.com/docs/20035/dcrcwe3.pdf, Height=0.4mm, Manufacturer_Part_Number=CRCW040247K0FKED, Mouser Price/Stock=https://www.mouser.co.uk/ProductDetail/Vishay-Dale/CRCW040247K0FKED?qs=rzhQWu8UUS0SPbmGf0DOIg%3D%3D
R6 R7: library part CRCW04021K00JNED, "Resistor", LCSC Part #=C279981, Manufacturer_Name=Vishay, Mouser Part Number=71-CRCW0402J-1.0K-E3, Arrow Part Number=CRCW04021K00JNED, Arrow Price/Stock=https://www.arrow.com/en/products/crcw04021k00jned/vishay, Datasheet Link=http://www.vishay.com/docs/20035/dcrcwe3.pdf, Height=0.4mm, Manufacturer_Part_Number=CRCW04021K00JNED, Mouser Price/Stock=https://www.mouser.co.uk/ProductDetail/Vishay-Dale/CRCW04021K00JNED?qs=YX%252BK5oaHNYpGRsHVuzxl1A%3D%3D
RN111 RN112 RN113 RN114 RN121 RN122 RN123 RN124: "Resistor Network", LCSC Part #=C695188, Manufacturer_Name=KEMET, Mouser Part Number=603-YC164-JR-0768RL, Arrow Part Number=YC164-JR-0768RL, Arrow Price/Stock=https://www.arrow.com/en/products/yc164-jr-0768rl/yageo, Datasheet Link=https://www.yageo.com/upload/media/product/productsearch/datasheet/rchip/PYu-YC_TC_group_51_RoHS_L_9.pdf, Height=0.7mm, Manufacturer_Part_Number=YC164-JR-0768RL, Mouser Price/Stock=https://www.mouser.co.uk/ProductDetail/Yageo/YC164-JR-0768RL?qs=8cPjvKtxWv7AOp%2F0jDxI3w%3D%3D
RST_OUT: "Connector", Manufacturer_Name=Molex, Mouser Part Number=538-90120-0761, Datasheet Link=https://www.molex.com/pdm_docs/sd/901200761_sd.pdf, Height=5.6mm, Manufacturer_Part_Number=90120-0761, Mouser Price/Stock=https://www.mouser.co.uk/ProductDetail/Molex/90120-0761?qs=PvP5v7Eimsn%2F58TpDaAAow%3D%3D
SK1 SK2: library part MEMC_Skt, "MEMC socket", Arrow Part Number=8468-21B1-RK-TR, Manufacturer_Name=3M, Mouser Part Number=517-8468-21B1-RK-TR, Arrow Price/Stock=https://www.arrow.com/en/products/8468-21b1-rk-tr/3m, Datasheet Link=https://www.arrow.com/en/products/8468-21b1-rk-tr/3m, Height=4.6mm, Manufacturer_Part_Number=8468-21B1-RK-TR, Mouser Price/Stock=https://www.mouser.co.uk/ProductDetail/3M-Electronic-Solutions-Division/8468-21B1-RK-TR?qs=X%2F%2F06fXhnJ18zOj3KK47CQ%3D%3D
U1 U2 U21 U22: library part DRAM_1MX16_SOJ
Y1: "Crystal or Oscillator", Manufacturer_Name=CTS, Mouser Part Number=774-CB3-3C-50M0, Arrow Part Number=CB3-3C-50M0000, Arrow Price/Stock=https://www.arrow.com/en/products/cb3-3c-50m0000/cts, Datasheet Link=https://www.arrow.com/en/products/cb3-3c-50m0000/cts, Height=1.8mm, Manufacturer_Part_Number=CB3-3C-50M0000, Mouser Price/Stock=https://www.mouser.co.uk/ProductDetail/CTS-Electronic-Components/CB3-3C-50M0000/?qs=HL%252BYNjdyZ0t9%2FwogPxCGyA%3D%3D
Y2: library part 1107741, Manufacturer_Name=ARIES, Mouser Part Number=535-1107741, Datasheet Link=http://docs-emea.rs-online.com/webdocs/13f3/0900766b813f3237.pdf, Height=2.41mm, Manufacturer_Part_Number=1107741, Mouser Price/Stock=https://www.mouser.co.uk/ProductDetail/Aries-Electronics/1107741?qs=WZRMhwwaLl%2FApwqojhfzdA%3D%3D

## Free pads (board coordinates)
  round 2.8 hole 2.8 unplated: MH(4.172,76.4)

## Via types
v1: diameter 0.6, hole 0.3, TopLayer to BottomLayer, tented both sides, 338 vias
v2: diameter 0.8, hole 0.4, TopLayer to BottomLayer, tented both sides, 80 vias

## Nets (pads, with @x,y where several pads share a name; then routed paths per layer and width w, separated by ;. In a path a pad name is that pad's centre, name@x,y a point inside that pad or via, vN(x,y) a via of type N, cw(c..) or ccw(c..) an arc to the next point about the centre after c; other vN are vias at no path point)
A0: J1.26 SK1.26 SK2.26 | length 65.7
  TopLayer w0.2: J1.26@9.398,60.449 9.668,60.179 9.668,58.709 13.656,54.721 26.803,54.721 26.807,54.726 31.181,54.726 32.922,52.984 SK1.26@34.192,52.984 35.576,52.984 36.846,54.254 52.608,54.254 53.233,53.63 59.372,53.63 60.017,52.984 SK2.26@70.112,52.984
A1: J1.24 SK1.25 SK2.25 | length 64
  TopLayer w0.2: J1.24@10.668,60.449 10.695,60.422 10.695,58.871 14.475,55.091 26.649,55.091 26.654,55.096 31.998,55.096 32.611,54.483 33.359,54.483 33.587,54.254 35.743,54.254 36.363,54.874 48.449,54.874 49.135,55.561 53.106,55.561 53.792,54.874 60.062,54.874 60.682,54.254 SK2.25@70.112,54.254
A2: J1.22 SK1.24 SK2.24 | length 62.1
  TopLayer w0.2: J1.22@11.938,60.449 11.98,60.407 11.98,58.218 14.736,55.461 26.496,55.461 26.501,55.466 32.616,55.466 32.656,55.507 34.175,55.507 SK1.24@34.192,55.524 48.189,55.524 48.809,56.144 55.125,56.144 55.127,56.146 55.682,56.146 55.684,56.144 61.347,56.144 61.993,55.499 70.087,55.499 SK2.24@70.112,55.524
A3: J1.20 SK1.23 SK2.23 | length 60.8
  TopLayer w0.2: J1.20@13.208,60.449 13.239,60.418 13.239,58.871 16.279,55.831 26.343,55.831 26.347,55.836 32.462,55.836 33.171,56.544 33.942,56.544 SK1.23@34.192,56.794 46.395,56.794 47.015,57.414 62.23,57.414 63.002,56.642 69.96,56.642 SK2.23@70.112,56.794
A4: J1.25 SK1.22 SK2.22 | length 68.1
  TopLayer w0.2: J1.25@9.398,64.519 9.449,64.468 9.449,62.941 10.269,62.121 13.672,62.121 13.845,61.948 13.845,58.945 16.589,56.201 26.19,56.201 26.194,56.206 31.197,56.206 33.055,58.064 SK1.22@34.192,58.064 ; SK1.22@34.192,58.064 44.75,58.064 45.37,58.684 62.898,58.684 63.518,58.064 SK2.22@70.112,58.064
A5: J1.23 SK1.21 SK2.21 | length 66.9
  TopLayer w0.2: J1.23@10.668,64.519 10.668,62.916 11.093,62.491 14.572,62.491 15.113,61.95 15.113,58.948 17.119,56.941 25.883,56.941 25.888,56.946 26.607,56.946 27.113,57.452 27.404,57.452 29.036,59.084 33.942,59.084 SK1.21@34.192,59.334 34.345,59.182 42.902,59.182 43.675,59.954 63.9,59.954 64.546,59.309 70.087,59.309 SK2.21@70.112,59.334
A6: J1.21 SK1.20 SK2.20 | length 65.3
  TopLayer w0.2: J1.21@11.938,64.519 12.187,64.27 12.187,62.979 12.304,62.861 15.472,62.861 16.385,61.948 16.385,58.945 17.649,57.681 25.577,57.681 25.581,57.686 25.757,57.686 28.478,60.407 33.995,60.407 34.391,60.803 41.659,60.803 42.111,61.254 65.84,61.254 66.49,60.604 SK2.20@70.112,60.604
A7: J1.19 SK1.19 SK2.19 | length 61.3
  TopLayer w0.2: J1.19@13.208,64.519 v1(13.208,66.421) ; v1(32.722,61.911) 34.156,61.911 SK1.19@34.192,61.874 40.155,61.874 40.787,62.506 66.204,62.506 66.836,61.874 SK2.19@70.112,61.874
  VCC w0.2: v1(13.208,66.421) 17.822,61.807 28.963,61.807 29.067,61.911 v1(32.722,61.911)
A8: J1.17 SK1.18 SK2.18 | length 60.2
  TopLayer w0.2: J1.17@14.445,64.46 v1@14.445,66.362 ; v1(32.722,63.124) 34.172,63.124 SK1.18@34.192,63.144 54.042,63.144 54.662,63.764 59.106,63.764 59.376,63.494 67.267,63.494 67.617,63.144 SK2.18@70.112,63.144
  VCC w0.2: v1(14.445,66.421) 18.688,62.177 28.81,62.177 29.756,63.124 v1(32.722,63.124)
A9: J1.15 SK1.17 SK2.17 | length 59.1
  TopLayer w0.2: J1.15@15.793,64.46 v1@15.793,66.362 ; v1(32.722,64.418) 34.189,64.418 SK1.17@34.192,64.414 34.421,64.643 55.741,64.643 56.132,65.034 60.837,65.034 61.04,64.832 67.683,64.832 68.1,64.414 SK2.17@70.112,64.414
  VCC w0.2: v1(15.793,66.421) 18.019,64.194 19.666,62.547 28.346,62.547 30.216,64.418 v1(32.722,64.418)
A10: J1.13 SK1.16 SK2.16 | length 58.1
  TopLayer w0.2: J1.13@16.988,64.46 v1@16.988,66.362 ; v1(32.722,65.684) SK1.16@34.192,65.684 54.25,65.684 54.87,66.304 61.427,66.304 61.818,65.913 69.883,65.913 SK2.16@70.112,65.684
  VCC w0.2: v1(16.988,66.421) 20.491,62.917 28.141,62.917 30.908,65.684 v1(32.722,65.684)
A11: J1.11 SK1.15 SK2.15 | length 56.4
  TopLayer w0.2: J1.11@18.265,64.46 v1@18.265,66.362 ; v1(32.722,66.954) SK1.15@34.192,66.954 37.933,66.954 38.59,67.612 61.536,67.612 62.346,66.802 69.96,66.802 SK2.15@70.112,66.954
  VCC w0.2: v1(18.265,66.421) 20.415,64.27 26.079,64.27 28.764,66.954 v1(32.722,66.954)
A12: J1.9 SK1.14 SK2.14 | length 55.3
  TopLayer w0.2: J1.9@19.599,64.46 v1@19.599,66.362 ; v1(32.722,68.224) SK1.14@34.192,68.224 34.358,68.059 34.55,68.251 35.33,68.251 35.954,68.874 58.619,68.874 58.625,68.88 68.008,68.88 68.664,68.224 SK2.14@70.112,68.224
  VCC w0.2: v1(19.599,66.421) 21.38,64.64 25.926,64.64 29.51,68.224 v1(32.722,68.224)
A13: J1.7 SK1.13 SK2.13 | length 54.2
  TopLayer w0.2: J1.7@20.768,64.46 v1@20.768,66.362 ; v1(32.722,69.494) SK1.13@34.192,69.494 54.762,69.494 55.382,70.114 60.071,70.114 60.691,69.494 SK2.13@70.112,69.494
  VCC w0.2: v1(20.768,66.421) 22.179,65.01 25.773,65.01 30.257,69.494 v1(32.722,69.494)
A14: J1.5 SK1.12 SK2.12 | length 53.9
  TopLayer w0.2: J1.5@22.038,64.401 v1@22.038,66.303 ; v1(32.722,70.764) SK1.12@34.192,70.764 34.235,70.722 35.33,70.722 36.153,69.899 54.644,69.899 56.129,71.384 60.451,71.384 61.196,70.639 69.987,70.639 SK2.12@70.112,70.764
  VCC w0.2: v1(22.038,66.421) 22.978,65.481 25.721,65.481 31.004,70.764 v1(32.722,70.764)
A15: J1.3 SK1.11 SK2.11 | length 53.6
  TopLayer w0.2: J1.3@23.304,64.46 v1@23.304,66.362 ; v1(32.413,71.988) 34.146,71.988 34.344,72.186 36.169,72.186 38.085,70.269 52.769,70.269 55.154,72.654 64.353,72.654 64.973,72.034 SK2.11@70.112,72.034
  VCC w0.2: v1(23.304,66.421) 23.874,65.851 25.567,65.851 31.704,71.988 v1(32.413,71.988)
A16: J1.1 SK1.10 SK2.10 | length 58.9
  TopLayer w0.2: J1.1@24.578,64.46 v1@24.578,66.362 ; SK1.10@34.192,73.304 36.112,73.304 37.072,72.344 v1(37.134,72.344) 37.134,72.273 38.767,70.639 52.418,70.639 55.382,73.604 55.382,75.861 55.611,76.09 56.996,76.09 58.753,74.333 64.473,74.333 65.501,73.304 SK2.10@70.112,73.304
  VCC w0.2: v1(24.578,66.421) 25.568,66.421 31.705,72.558 36.811,72.558 37.025,72.344 v1(37.134,72.344)
A17: J1.12 SK1.8 SK2.8 | length 78.7
  TopLayer w0.2: J1.12@18.288,60.449 18.396,60.341 18.396,58.871 19.216,58.051 25.438,58.051 30.694,63.307 30.694,72.76 34.145,76.211 36.726,76.211 36.975,75.962 36.975,74.832 SK1.8@36.982,74.824 36.982,73.639 39.612,71.009 51.584,71.009 54.102,73.527 54.102,73.747 54.112,73.758 54.112,75.891 54.102,75.902 54.102,76.331 54.601,76.83 72.128,76.83 72.902,76.056 SK2.8@72.902,74.824
A18: J1.10 SK1.7 SK2.7 | length 79
  TopLayer w0.2: J1.10@19.558,60.449 19.828,60.179 19.828,58.991 20.397,58.421 25.284,58.421 30.324,63.461 30.324,72.914 33.991,76.581 37.623,76.581 38.242,75.962 38.242,74.835 SK1.7@38.252,74.824 38.252,73.533 40.406,71.379 50.665,71.379 52.872,73.587 52.872,76.951 53.121,77.2 73.266,77.2 74.172,76.294 SK2.7@74.172,74.824
A19: J1.8 SK1.6 SK2.6 | length 79
  TopLayer w0.2: J1.8@20.828,60.449 21.077,60.2 21.077,58.909 21.194,58.791 25.131,58.791 29.954,63.614 29.954,73.067 33.838,76.951 38.459,76.951 39.37,76.04 39.37,74.977 SK1.6@39.522,74.824 39.522,73.545 41.318,71.749 49.66,71.749 51.572,73.661 51.572,77.076 52.066,77.57 74.145,77.57 75.442,76.273 SK2.6@75.442,74.824
A20: J1.2 SK1.5 SK2.5 | length 75.1
  TopLayer w0.2: J1.2@24.638,60.449 24.638,61.204 24.908,61.474 27.29,61.474 29.584,63.767 29.584,73.22 33.804,77.441 39.347,77.441 40.792,75.995 SK1.5@40.792,74.824 40.822,74.795 40.822,73.573 42.275,72.119 48.826,72.119 50.332,73.625 50.332,76.798 51.474,77.94 75.032,77.94 76.712,76.26 SK2.5@76.712,74.824
A21: J1.4 SK1.4 SK2.4 | length 78
  TopLayer w0.2: J1.4@23.368,60.449 23.368,61.474 24.015,62.121 27.415,62.121 29.214,63.92 29.214,73.373 33.651,77.811 40.13,77.811 41.979,75.962 41.979,74.908 SK1.4@42.062,74.824 42.062,73.513 43.086,72.489 47.935,72.489 49.032,73.587 49.032,76.658 50.685,78.31 75.907,78.31 77.982,76.235 SK2.4@77.982,74.824
A22: J1.6 SK1.3 SK2.3 | length 81.5
  TopLayer w0.2: J1.6@22.098,60.449 22.368,60.719 22.368,62.15 22.71,62.491 25.27,62.491 25.748,62.491 26.82,62.491 27.261,62.491 28.808,64.038 28.808,73.491 33.498,78.181 41.119,78.181 43.306,75.994 43.306,74.851 SK1.3@43.332,74.824 43.332,73.661 44.134,72.859 47.158,72.859 47.762,73.464 47.762,77.079 47.767,77.083 47.767,77.402 49.045,78.68 76.723,78.68 79.252,76.151 SK2.3@79.252,74.824
A23: J1.14 SK1.2 SK2.2 | length 88.1
  TopLayer w0.2: J1.14@17.018,60.449 17.247,60.678 17.247,62.009 17.416,62.177 21.873,62.177 22.557,62.861 27.108,62.861 28.438,64.192 28.438,73.644 33.502,78.708 41.732,78.708 44.478,75.962 44.478,74.949 44.852,74.574 44.852,73.552 45.1,73.304 46.395,73.304 46.522,73.432 46.522,77.451 48.121,79.05 77.611,79.05 80.522,76.139 SK2.2@80.522,74.824
A24: J1.16 SK1.1 SK2.1 | length 93.1
  TopLayer w0.2: J1.16@15.748,60.449 15.924,60.273 15.924,58.871 17.484,57.311 25.73,57.311 25.734,57.316 26.193,57.316 v1(26.928,58.051) ; v1(26.928,63.487) 27.036,63.487 28.068,64.519 28.068,73.798 33.349,79.078 42.48,79.078 45.025,76.534 45.703,76.534 45.777,76.46 ; SK1.1@45.777,74.729 45.777,76.46 ; SK2.1@81.792,74.824 81.792,76.11 78.482,79.42 47.75,79.42 45.777,77.447 45.777,76.534 45.777,76.46
  GND w0.2: v1@26.971,58.094 v1@26.971,63.445
  BottomLayer w0.2: v1(26.928,58.051) v1@26.971,58.094 ; v1(26.928,63.487) v1@26.971,63.445
A25: J1.18 SK1.68 SK2.68 | length 99.7
  TopLayer w0.2: J1.18@14.478,60.449 14.743,60.184 14.743,58.794 16.966,56.571 26.036,56.571 26.041,56.576 26.761,56.576 26.96,56.776 27.542,56.776 v1(27.56,56.794) ; v1(27.498,64.764) 27.575,64.841 27.575,65.242 27.664,65.331 27.664,73.916 33.196,79.448 43.103,79.448 v1(45.1,77.451) 45.122,77.451 47.461,79.79 79.328,79.79 83.062,76.056 SK2.68@83.062,74.824 ; SK1.68@47.142,74.824 47.197,74.879 v1(47.197,77.319)
  GND w0.2: v1@27.498,56.857 v1(27.498,64.764)
  BottomLayer w0.2: v1@27.498,56.857 v1(27.56,56.794) ; v1(45.1,77.451) 45.166,77.385 47.131,77.385 v1(47.197,77.319)
ABRT: IC53.3 J2.12 | length 71.9
  TopLayer w0.2: J2.12@18.288,72.257 18.288,70.603 17.472,69.787 13.155,69.787 12.175,68.806 9.539,68.806 8.607,67.874 8.607,59.103 13.359,54.351 26.999,54.351 30.895,50.455 30.895,37.02 28.8,34.925 26.407,34.925 24.799,36.534 IC53.3@24.799,40.214
CLK: IC59.2 IC59.5 IC71.1 R13.1 | length 37.4
  BottomLayer w0.2: IC71.1@2.54,48.768 1.548,47.776 1.548,42.775 1.905,42.418 6.835,42.418 9.369,39.884 11.152,39.884 13.404,37.632 16.625,37.632 18.49,39.497 IC59.2@19.73,39.497 19.915,39.312 20.657,39.312 20.91,39.059 20.91,37.831 20.663,37.584 18.59,37.584 18.344,37.338 18.344,35.856 18.513,35.687 IC59.5@19.73,35.687 R13.1@21.384,35.687
CLK1: R8.1 SK1.67 | length 89
  TopLayer w0.2: SK1.67@48.412,74.824 v1(48.412,76.859)
  BottomLayer w0.2: R8.1@6.09,39.822 2.286,39.822 0.788,41.32 0.788,49.714 4.172,53.098 4.172,73.217 10.076,79.121 35.942,79.121 38.386,76.677 47.36,76.677 47.543,76.859 v1(48.412,76.859)
CLK2: R9.1 SK2.67 | length 86.4
  TopLayer w0.2: v1(78.983,72.489) 83.201,72.489 84.332,73.621 SK2.67@84.332,74.824
  BottomLayer w0.2: R9.1@22.549,34.417 23.289,34.417 25.116,32.59 29.084,32.59 30.525,34.031 30.525,39.312 31.472,40.259 43.765,40.259 62.728,59.222 62.728,63.197 69.676,70.144 77.025,70.144 78.952,72.072 78.952,72.459 v1(78.983,72.489)
CLKIN: J2.13 LK1.3 | length 62.4
  TopLayer w0.2: J2.13@17.018,76.327 17.018,74.549 16.857,74.388 10.277,74.388 10.157,74.268 8.53,74.268 7.578,73.316 7.578,57.656 14.71,50.524 23.671,50.524 26.656,47.54 26.656,39.036 27.664,38.029 LK1.3@27.664,36.253
D0: J3.C3 RN111.7 | length 10.3
  BottomLayer w0.2: J3.C3@16.205,4.013 17.569,5.377 17.569,9.687 19.47,11.588 RN111.7@19.47,12.954
D1: J3.A3 RN111.8 | length 4.9
  BottomLayer w0.2: J3.A3@16.205,9.093 16.288,9.093 18.568,11.373 18.568,12.852 RN111.8@18.67,12.954
D2: J3.A4 RN111.6 | length 4.5
  BottomLayer w0.2: J3.A4@18.745,9.093 18.745,9.3 20.168,10.723 20.168,12.852 RN111.6@20.27,12.954
D3: J3.C4 RN111.5 | length 9.7
  BottomLayer w0.2: J3.C4@18.745,4.013 19.87,5.138 19.87,9.632 20.968,10.729 RN111.5@20.968,12.831
D4: J3.A5 RN112.8 | length 7.1
  BottomLayer w0.2: J3.A5@21.285,9.093 23.545,11.353 25.386,11.353 26.375,12.342 26.375,12.819 RN112.8@26.486,12.93
D5: J3.C5 RN112.7 | length 12.5
  BottomLayer w0.2: J3.C5@21.285,4.013 22.743,5.471 22.743,9.728 23.676,10.662 25.527,10.662 27.161,12.296 27.161,12.805 RN112.7@27.286,12.93
D6: J3.C6 RN112.6 | length 10.7
  BottomLayer w0.2: J3.C6@23.825,4.013 25.202,5.39 25.202,9.597 27.961,12.356 27.961,12.805 RN112.6@28.086,12.93
D7: J3.A7 RN112.5 | length 4.9
  BottomLayer w0.2: J3.A7@26.365,9.093 26.365,9.372 28.768,11.775 28.768,12.812 RN112.5@28.886,12.93
D8: J3.A8 RN113.7 | length 4.9
  BottomLayer w0.2: J3.A8@28.905,9.093 31.276,11.464 31.276,12.835 RN113.7@31.395,12.954
D9: J3.C7 RN113.8 | length 10.7
  BottomLayer w0.2: J3.C7@26.365,4.013 27.686,5.334 27.686,9.495 30.52,12.329 30.52,12.879 RN113.8@30.595,12.954
D10: J3.C8 RN113.6 | length 10.3
  BottomLayer w0.2: J3.C8@28.905,4.013 30.226,5.334 30.226,9.571 32.201,11.546 32.201,12.948 RN113.6@32.195,12.954
D11: J3.A9 RN113.5 | length 4.5
  BottomLayer w0.2: J3.A9@31.445,9.093 31.642,9.29 31.642,9.981 33.001,11.34 33.001,12.948 RN113.5@32.995,12.954
D12: J3.A10 RN114.7 | length 4.8
  BottomLayer w0.2: J3.A10@33.985,9.093 36.125,11.233 RN114.7@36.125,13
D13: J3.C9 RN114.8 | length 10.6
  BottomLayer w0.2: J3.C9@31.445,4.013 32.776,5.344 32.776,9.739 35.325,12.288 RN114.8@35.325,13
D14: J3.A11 RN114.5 | length 4.4
  BottomLayer w0.2: J3.A11@36.525,9.093 36.572,9.14 36.572,10.026 37.6,11.054 37.6,12.875 RN114.5@37.725,13
D15: J3.C11 RN114.6 | length 10.1
  BottomLayer w0.2: J3.C11@36.525,4.013 35.375,5.163 35.375,9.747 36.925,11.297 RN114.6@36.925,13
D16: J3.C13 RN121.7 | length 13.5
  BottomLayer w0.2: J3.C13@41.605,4.013 44.308,6.716 46.467,6.716 47.851,8.1 47.881,10.288 49.511,11.918 RN121.7@49.511,12.954
D17: J3.A13 RN121.8 | length 9.1
  BottomLayer w0.2: J3.A13@41.605,9.093 42.982,10.47 46.96,10.47 48.711,12.221 RN121.8@48.711,12.954
D18: J3.C18 RN121.6 | length 10.9
  BottomLayer w0.2: RN121.6@50.311,12.954 50.311,12.021 51.563,10.768 52.025,10.768 53.118,9.676 53.118,7.368 54.305,6.18 J3.C18@54.305,4.013
D19: J3.A19 RN121.5 | length 7.9
  BottomLayer w0.2: RN121.5@51.111,12.954 51.111,12.032 51.639,11.504 54.434,11.504 J3.A19@56.845,9.093
D20: J3.A20 RN122.7 | length 5.3
  BottomLayer w0.2: J3.A20@59.385,9.093 62.7,12.408 62.7,12.829 RN122.7@62.825,12.954
D21: J3.C19 RN122.8 | length 11.9
  BottomLayer w0.2: J3.C19@56.845,4.013 58.303,5.471 58.303,10.029 58.745,10.47 60.1,10.47 61.955,12.325 61.955,12.884 RN122.8@62.025,12.954
D22: J3.A22 RN122.5 | length 3.9
  BottomLayer w0.2: RN122.5@64.425,12.954 64.465,12.914 J3.A22@64.465,9.093
D23: J3.C21 RN122.6 | length 9.6
  BottomLayer w0.2: J3.C21@61.925,4.013 63.235,5.323 63.235,9.714 63.625,10.104 RN122.6@63.625,12.954
D24: J3.C23 RN123.6 | length 11.4
  BottomLayer w0.2: J3.C23@67.005,4.013 70.642,7.65 70.642,9.537 72.885,11.78 RN123.6@72.885,12.954
D25: J3.A23 RN123.8 | length 6.4
  BottomLayer w0.2: J3.A23@67.005,9.093 69.417,11.505 70.642,11.505 71.285,12.148 RN123.8@71.285,12.954
D26: J3.A24 RN123.7 | length 4.9
  BottomLayer w0.2: J3.A24@69.545,9.093 71.96,11.508 71.96,12.829 RN123.7@72.085,12.954
D27: J3.C24 RN123.5 | length 10.7
  BottomLayer w0.2: J3.C24@69.545,4.013 73.46,7.928 73.46,10.475 73.685,10.7 RN123.5@73.685,12.954
D28: J3.A26 RN124.8 | length 14.9
  BottomLayer w0.2: J3.A26@74.625,9.093 76.835,11.303 86.573,11.303 87.515,12.245 RN124.8@87.515,12.954
D29: J3.C25 RN124.6 | length 21.4
  BottomLayer w0.2: J3.C25@72.085,4.013 75.311,7.239 84.582,7.239 86.106,8.763 86.106,9.453 89.011,12.359 89.011,12.85 RN124.6@89.115,12.954
D30: J3.A27 RN124.7 | length 13.1
  BottomLayer w0.2: J3.A27@77.165,9.093 78.973,10.901 86.923,10.901 88.315,12.293 RN124.7@88.315,12.954
D31: J3.C26 RN124.5 | length 21
  BottomLayer w0.2: J3.C26@74.625,4.013 76.454,5.842 86.186,5.842 88.474,8.13 88.474,10.643 89.915,12.084 RN124.5@89.915,12.954
EN1: IC59.1 IC71.19 R6.1 | length 13.2
  BottomLayer w0.2: R6.1@8.774,46.228 IC71.19@10.16,46.228 13.435,46.228 18.785,40.879 19.618,40.879 IC59.1@19.73,40.767
EN2: IC59.4 IC71.18 R7.1 | length 18.5
  BottomLayer w0.2: R7.1@8.678,43.688 IC71.18@10.16,43.688 15.201,43.688 18.797,40.092 20.838,40.092 21.477,39.453 21.477,37.541 20.894,36.957 IC59.4@19.73,36.957
ERstn: IC71.9 IC99.8 R4.1 | length 18.9
  BottomLayer w0.2: IC71.9@2.54,28.448 R4.1@4.022,28.448 4.039,28.431 4.039,27.965 11.176,20.828 14.897,20.828 16.802,18.923 IC99.8@17.239,18.923
FLBK: IC4.6 J2.23 | length 52.5
  TopLayer w0.2: v1(8.325,74.838) 8.433,74.838 8.601,74.669 10.035,74.669 10.668,75.302 J2.23@10.668,76.327
  BottomLayer w0.2: v1(8.325,74.838) 8.331,74.838 10.035,73.133 10.035,62.355 17.478,54.912 38.678,54.912 40.605,52.984 IC4.6@41.809,52.984
GND: C1.2 C2.2 C3.2 C4.2 C5.2 C6.2 C7.2 C8.2 C9.2 C10.2 C11.2 C12.2 C13.2 C14.2 C15.2 C16.2 C17.2 C18.2 C21.2 C22.2 C23.2 C24.2 C25.2 C26.2 C27.2 C28.2 C30.2 D1.2 IC1.7 IC4.8 IC52.7 IC53.7 IC59.7 IC71.6 IC71.10 IC71.11 IC99.7 J2.5 J2.11 J2.21 J3.A1 J3.A12 J3.A21 J3.A32 J3.C1 J3.C12 J3.C22 J3.C32 R5.2 SK1.27 SK1.61 SK2.27 SK2.61 U1.22 U1.37 U1.42 U2.22 U2.37 U2.42 U21.22 U21.37 U21.42 U22.22 U22.37 U22.42 Y1.2 Y2.2 | length 11
  TopLayer w0.2: 65.127,25.284 67.297,23.114 U21.37@70.362,23.114 73.203,23.114 73.602,23.513 v2(73.764,23.513)
  TopLayer w0.8: SK1.61@56.082,74.554 v2(57.375,74.554)
  other v1: 1.397,1.905 98.552,2.032 50.292,6.477 22.091,11.621 34.163,12.253 17.327,12.367 54.586,12.801 66.531,12.801 39.359,13.053 98.552,13.843 22.805,14.942 1.397,15.748 15.068,16.515 39.359,16.691 42.886,16.691 68.253,16.826 27.664,17.145 78.02,17.252 91.694,18.734 11.91,19.352 7.61,21.664 37.512,22.733 29.655,22.86 42.702,22.903 93.481,23.111 77.49,23.368 39.243,23.405 57.982,23.405 40.077,25.041 12.426,25.252 36.905,26.305 37.22,27.569 41.55,29.452 47.509,29.452 58.13,29.464 88.028,29.698 73.767,29.96 67.788,30.976 42.702,32.258 77.142,32.965 24.899,33.973 32.201,34.158 12.308,34.375 38.122,35.183 88.474,35.226 42.161,35.322 77.062,35.814 8.328,36.253 23.989,36.698 29.751,37.183 31.465,37.831 62.57,38.47 11.682,38.548 98.552,38.779 7.2,40.952 16.589,41.092 78.28,42.309 22.368,42.418 11.603,42.606 42.283,43.204 49.332,43.248 29.782,43.815 25.55,43.889 18.181,44.063 12.797,44.935 6.204,44.994 67.295,45.106 16.128,46.332 31.465,46.683 53.172,46.863 73.533,46.863 5.74,48.073 8.189,48.147 26.041,49.166 15.21,49.213 27.521,49.294 34.728,49.503 56.282,49.503 20.468,49.772 3.653,50.859 24.268,51.094 12.639,51.261 1.397,51.308 14.782,52.569 30.236,53.105 98.552,53.467 73.443,53.904 79.602,53.904 83.989,53.904 8.798,54.985 3.35,55.897 43.986,56.144 78.332,56.134 81.915,56.134 29.196,56.946 9.097,57.353 45.872,57.494 13.239,57.814 17.918,58.414 30.48,58.414 84.332,58.876 44.252,59.247 39.172,60.226 42.533,60.452 60.669,60.604 1.397,61.087 29.847,61.156 83.543,61.254 41.142,61.566 64.633,61.911 5.345,63.51 98.552,63.764 48.361,63.817 53.246,63.844 50.66,66.624 45.522,66.702 20.114,67.513 65.786,67.564 13.424,67.96 37.737,68.182 72.316,68.185 50.087,68.203 3.26,68.491 89.762,69.144 8.743,69.447 36.153,71.384 54.87,71.377 72.166,72.489 6.192,72.583 85.952,72.654 1.143,72.761 74.522,72.802 25.883,74.813 98.679,75.946 29.847,77.076 27.415,77.447 49.332,77.94 11.938,78.174 18.257,78.243 82.142,79.05 1.143,79.121 7.635,79.566 45.166,79.648
  other v2: 2.095,10.965 41.689,13.564 57.446,13.721 77.474,13.721 92.743,13.721 70.076,15.546 34.575,15.677 47.598,16.527 82.995,17.252 20.493,18.923 65.669,23.17 52.111,23.293 87.538,23.368 19.73,23.678 48.071,25.838 98.183,25.987 31.326,27.369 36.8,29.464 12.308,29.503 82.881,29.718 77.474,30.083 24.384,30.104 93.536,30.462 32.345,30.744 53.492,30.988 64.025,31.115 19.851,31.393 65.149,34.237 93.497,35.143 85.598,43.343 35.806,43.545 70.943,43.567 56.769,44.849 78.902,46.219 93.998,46.219 46.228,46.863 70.739,48.548 41.735,48.877 77.35,48.877 60.122,49.138 89.062,49.138 97.155,50.764 66.785,51.309 70.336,51.459 34.482,51.5 7.928,52.388 72.316,59.936 90.912,59.936 89.762,71.384 66.281,75.179 60.846,75.311 91.952,76.83
M1ABRT: IC53.1 SK1.53 | length 53.2
  TopLayer w0.2: IC53.1@22.259,40.214 22.37,40.325 22.37,41.159 23.628,42.418 v1(24.13,42.418) ; SK1.53@57.552,64.414 v1(59.376,64.414)
  BottomLayer w0.2: v1(24.13,42.418) 43.831,42.418 59.376,57.964 v1(59.376,64.414)
M1DBE: IC1.1 IC1.3 J2.6 SK1.56 | length 98.9
  TopLayer w0.2: v1(22.098,67.866) J2.6@22.098,72.257 ; SK1.56@57.552,68.224 v1(59.497,68.224) 67.509,68.224 v1(68.1,67.633)
  BottomLayer w0.2: v1(22.098,67.866) 22.107,67.874 26.076,67.874 31.396,62.554 32.958,62.554 32.969,62.564 45.753,62.564 49.633,58.684 56.059,58.684 56.597,59.223 56.597,63.909 59.497,66.809 v1(59.497,68.224) ; IC1.1@59.788,38.47 60.788,38.47 61.553,39.235 61.553,41.01 ; IC1.3@59.788,41.01 61.553,41.01 ; v1(68.1,67.633) 63.098,62.631 63.098,58.851 61.553,57.305 61.553,41.01
M1nCAS0: SK1.39 U1.31 | length 29
  TopLayer w0.2: U1.31@34.986,30.734 34.994,30.727 37.061,30.727 v1(37.068,30.719) ; SK1.39@50.952,51.464 50.952,47.52 v1(51.396,47.076)
  BottomLayer w0.2: v1@36.982,30.734 36.982,32.663 v1(51.396,47.076)
M1nCAS1: SK1.40 U1.30 | length 28.2
  TopLayer w0.2: U1.30@34.986,32.004 v1(37.639,32.004) ; v1(52.222,47.837) SK1.40@52.222,51.464
  BottomLayer w0.2: v1(37.639,32.004) 37.716,32.081 37.716,32.59 52.222,47.097 v1(52.222,47.837)
M1nCAS2: SK1.41 U2.31 | length 23.7
  TopLayer w0.2: U2.31@49.962,30.734 51.338,30.734 54.356,33.752 54.356,49.444 53.492,50.308 SK1.41@53.492,51.464
M1nCAS3: SK1.42 U2.30 | length 27
  TopLayer w0.2: U2.30@49.962,32.004 52.085,32.004 53.986,33.905 53.986,49.001 52.867,50.12 52.867,52.526 53.146,52.805 54.325,52.805 54.549,52.58 54.549,51.678 SK1.42@54.762,51.464
M1nRAS: SK1.38 U1.14 U2.14 | length 36.3
  TopLayer w0.2: U1.14@44.9,33.279 46.717,33.279 46.979,33.279 47.637,32.621 52.111,32.621 v1@52.769,33.279 ; SK1.38@49.682,51.464 49.682,47.837 53.616,43.903 53.616,34.126 v1@52.769,33.279 ; v1(52.661,33.386) v1@52.769,33.279 ; v1(56.382,33.308) 56.399,33.291 60.105,33.291 U2.14@60.122,33.274
  BottomLayer w0.2: v1(52.661,33.386) 53.268,33.386 53.361,33.293 56.368,33.293 v1(56.382,33.308)
M1OE: IC1.6 U1.29 U2.29 | length 34.5
  TopLayer w0.2: U1.29@34.735,33.274 42.671,33.274 43.321,33.924 47.564,33.924 48.214,33.274 U2.29@49.962,33.274 51.618,33.274 53.046,34.702 v1(53.046,34.798)
  BottomLayer w0.2: v1(53.046,34.798) 55.647,34.798 57.465,36.615 57.465,43.567 58.746,44.849 59.759,44.849 IC1.6@59.788,44.82
M1RA0: SK1.28 U1.17 U2.17 | length 44.1
  TopLayer w0.2: SK1.28@36.982,51.464 36.982,49.034 32.339,44.391 32.339,37.828 33.729,36.438 40.959,36.438 41.605,37.084 44.895,37.084 44.899,37.08 46.728,37.08 v1(46.731,37.077) ; v1(56.487,37.077) 56.49,37.08 60.061,37.08 U2.17@60.065,37.077
  BottomLayer w0.2: v1(46.731,37.077) 46.735,37.08 56.483,37.08 v1(56.487,37.077)
M1RA1: SK1.29 U1.18 U2.18 | length 43.2
  TopLayer w0.2: SK1.29@38.252,51.464 38.252,49.503 32.709,43.96 32.709,38.728 33.724,37.714 39.789,37.714 40.429,38.354 44.895,38.354 v1(46.729,38.354) ; v1(56.487,38.381) U2.18@60.166,38.381
  BottomLayer w0.2: v1(46.729,38.354) 56.46,38.354 v1(56.487,38.381)